# Altium PCB Mother_Board.PcbDoc
Units mm, origin at the board's own origin, x right, y up, seen from the top; angles counter-clockwise.
Board outline 70 x 70 mm, 4 copper layers (Top Layer, Layer 1, Layer 2, Bottom Layer), stack 0.603 mm thick; 62 components, 61 nets, 392 pads, 77 vias.
Unrouted connection lines stored in the file: 36.
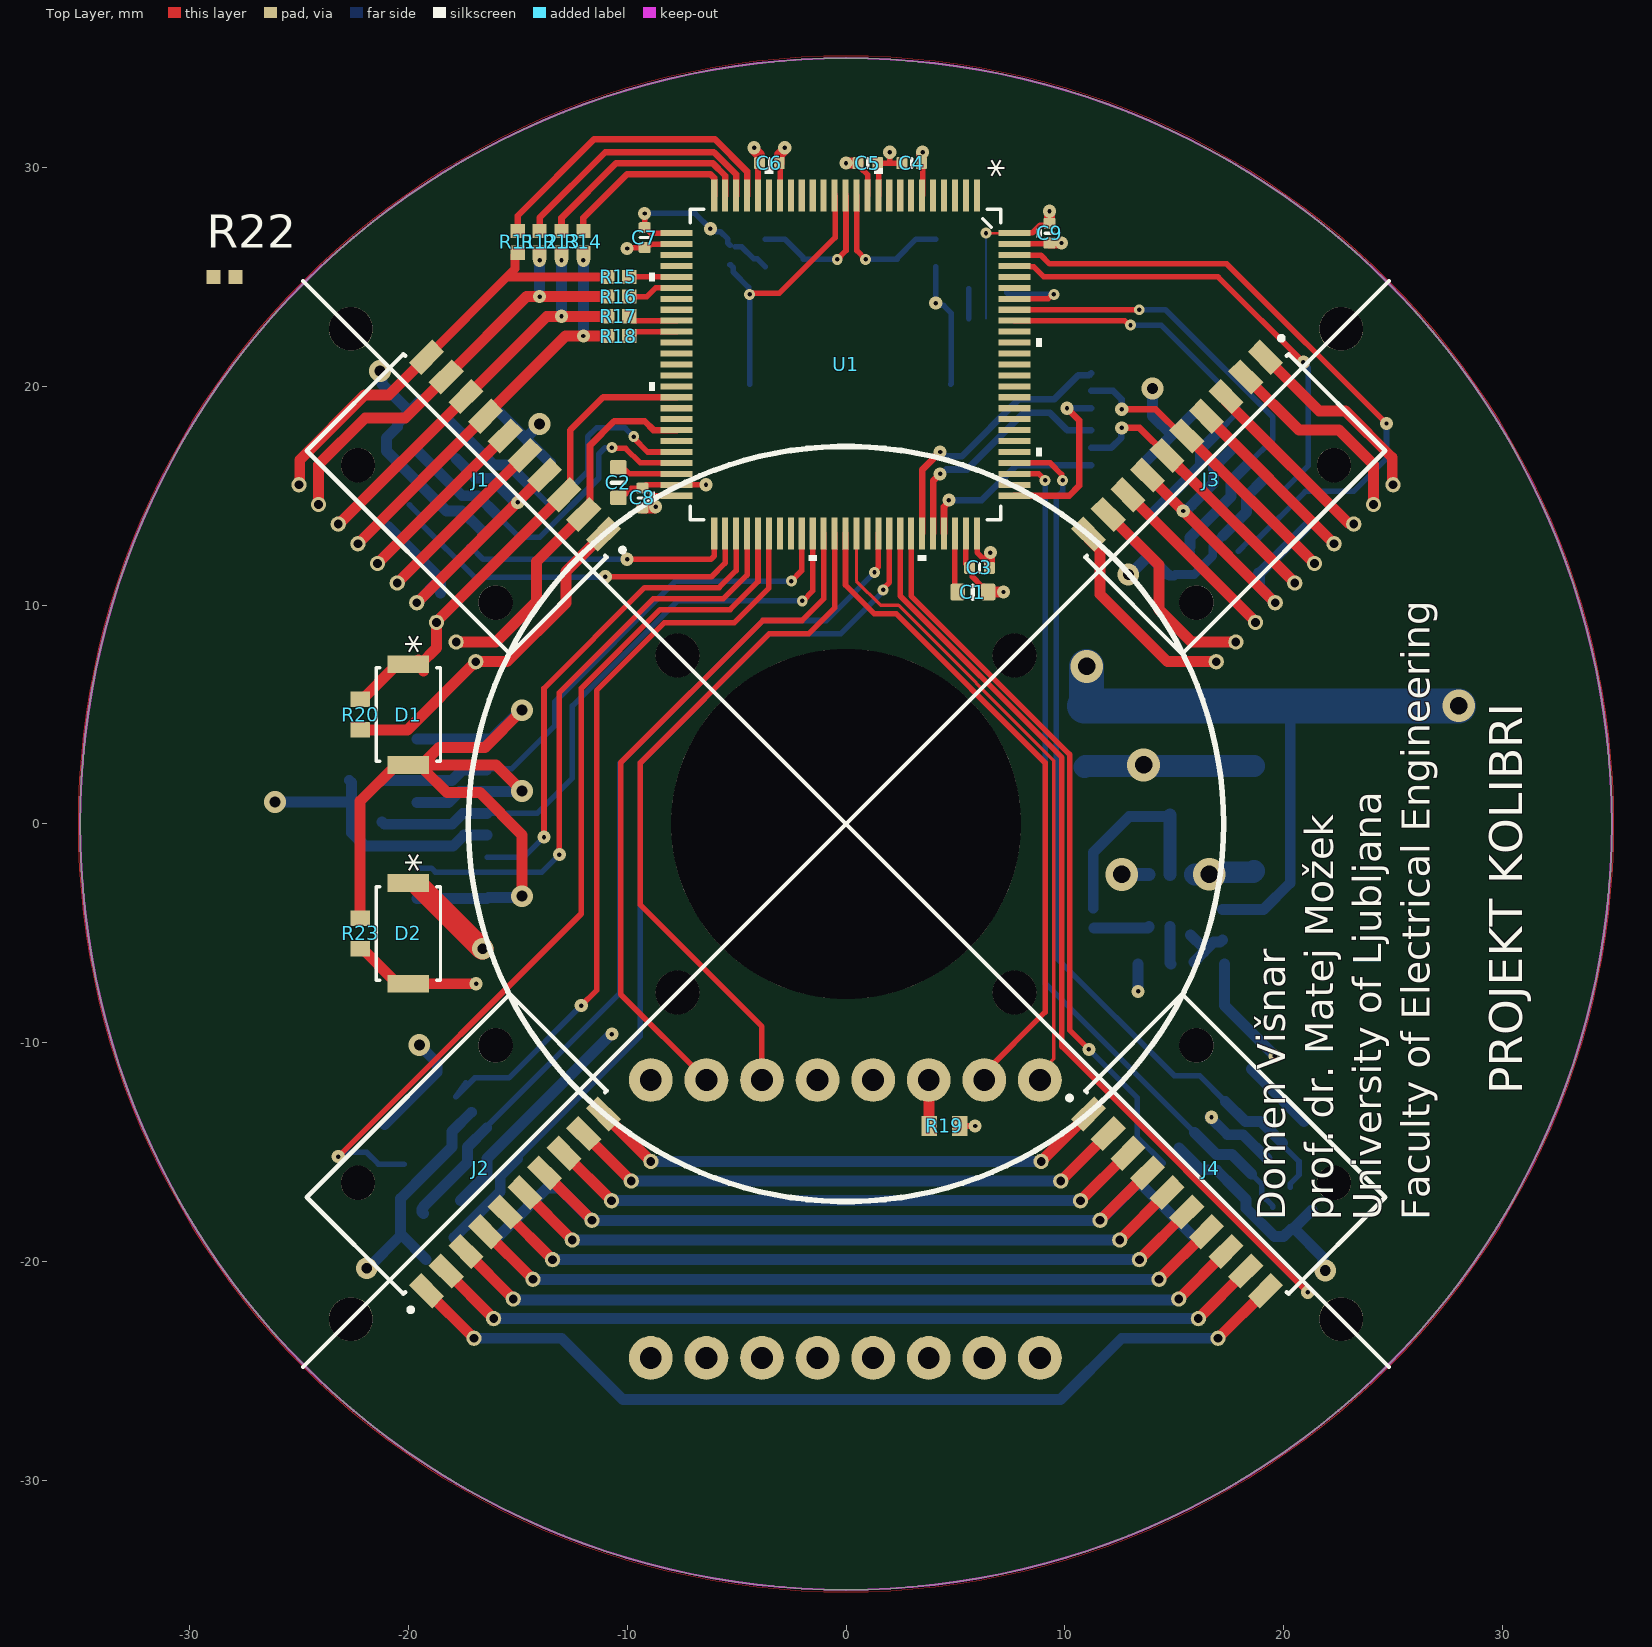
[diagram p0: Top Layer view]
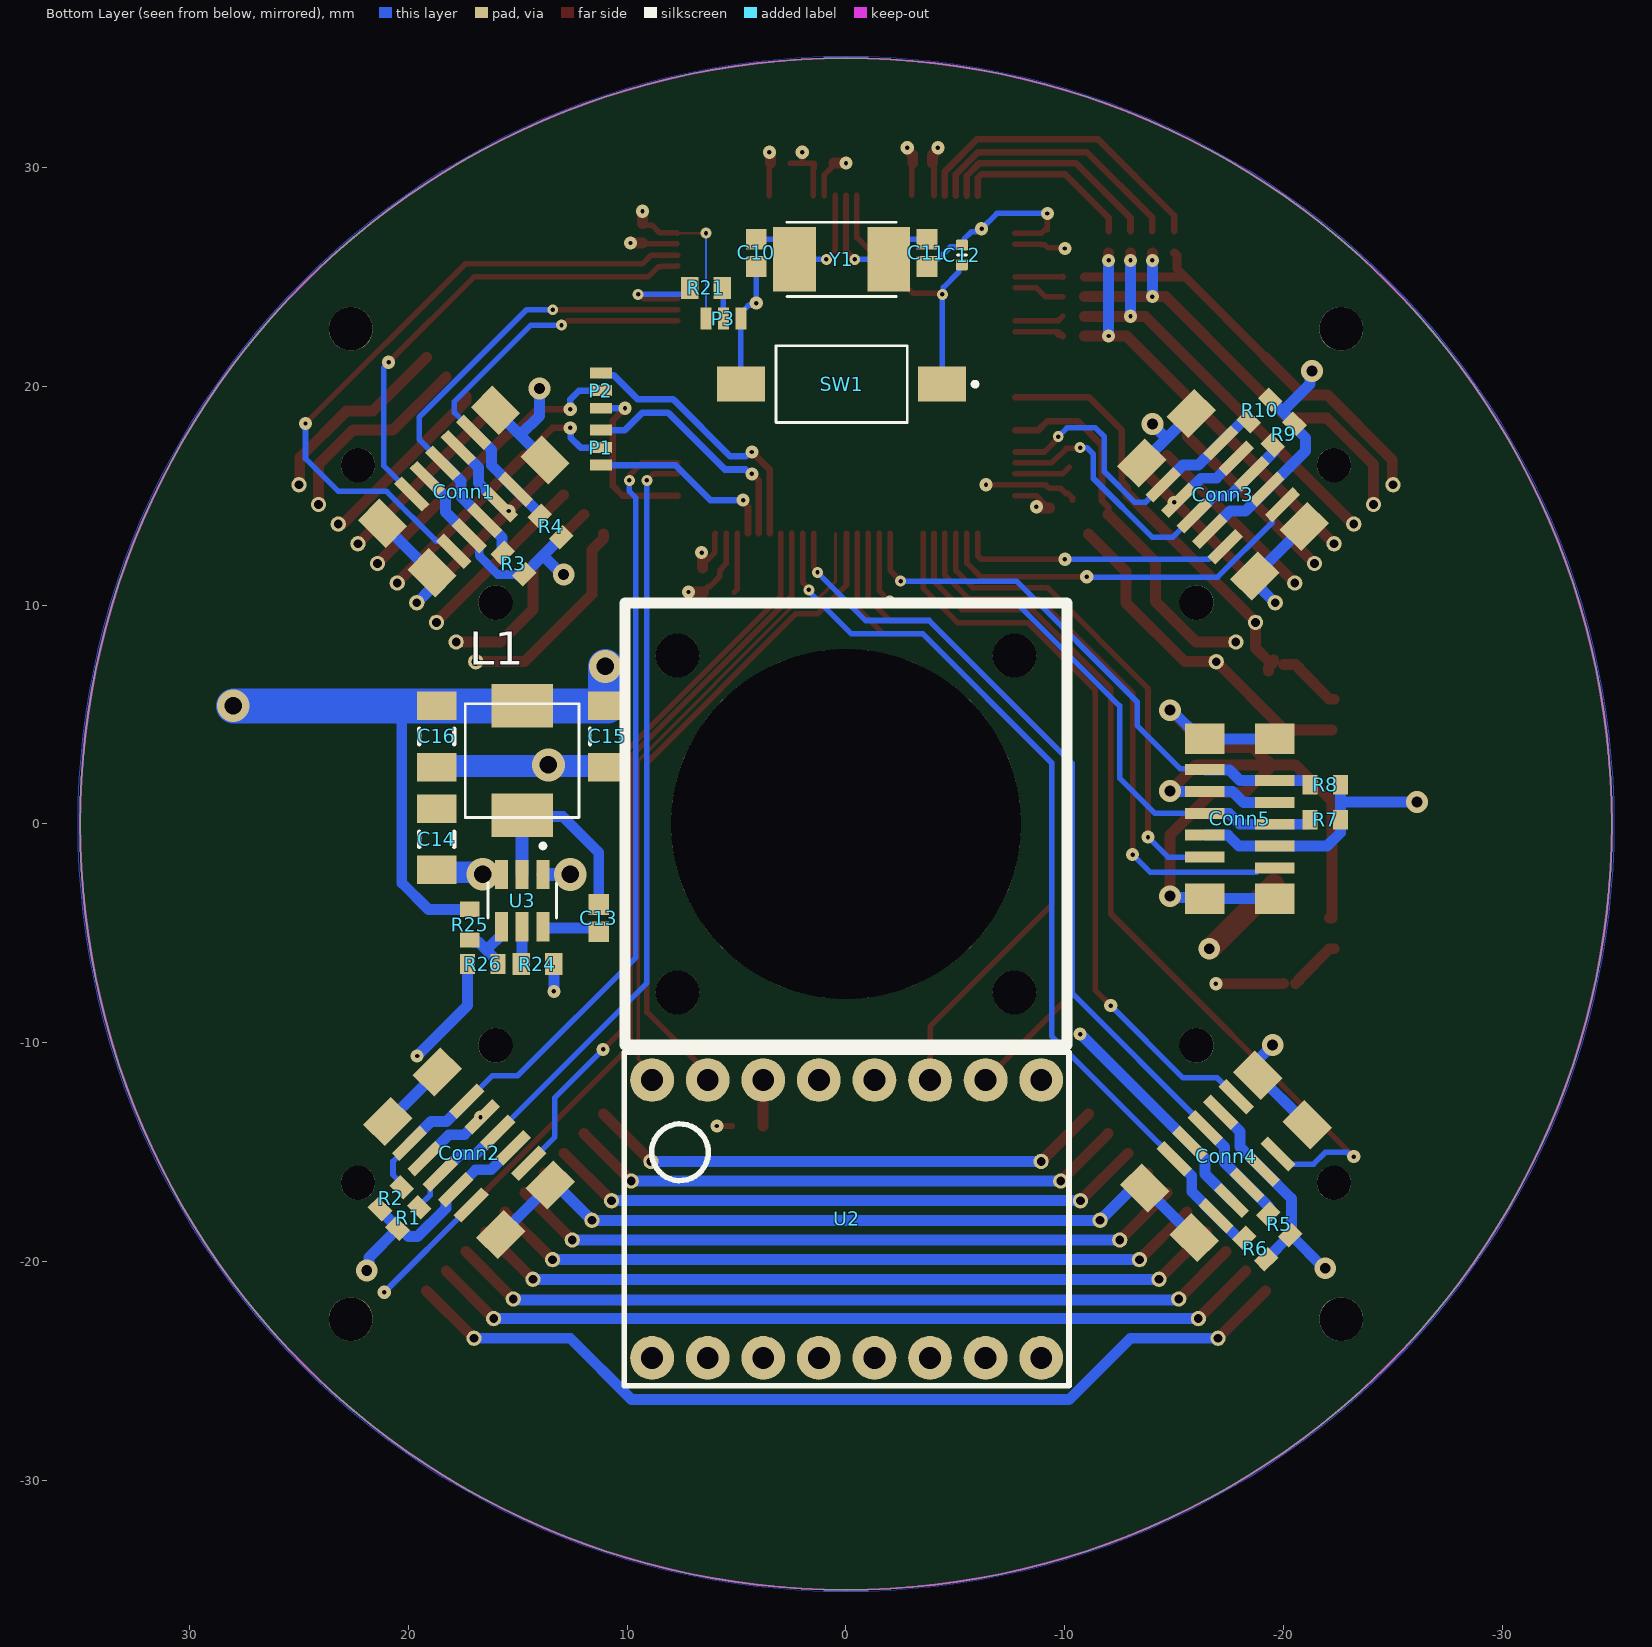
[diagram p1: Bottom Layer view, seen from below]
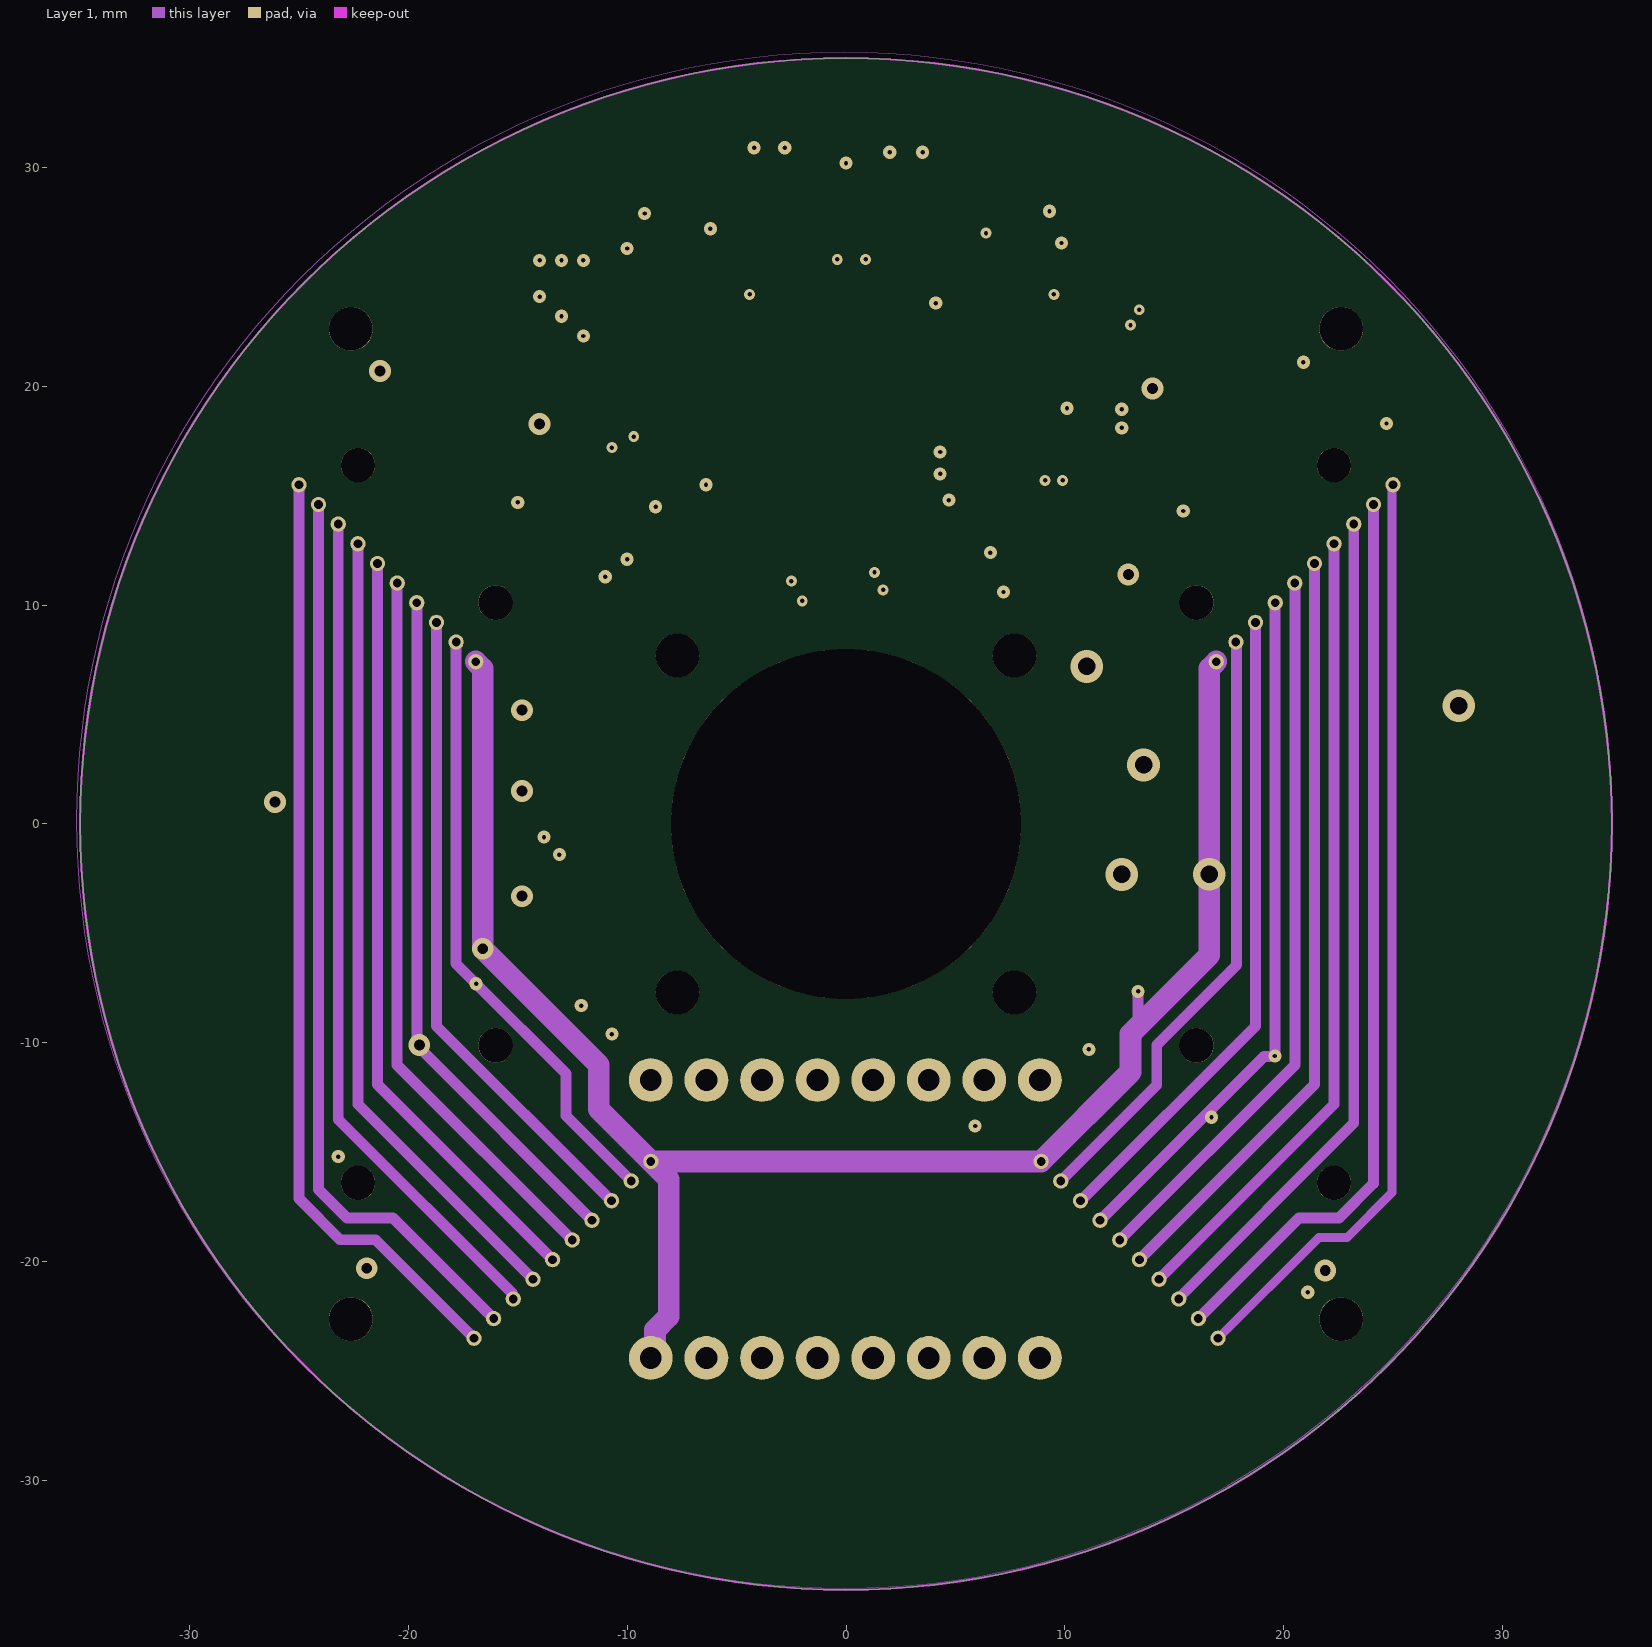
[diagram p2: Layer 1]
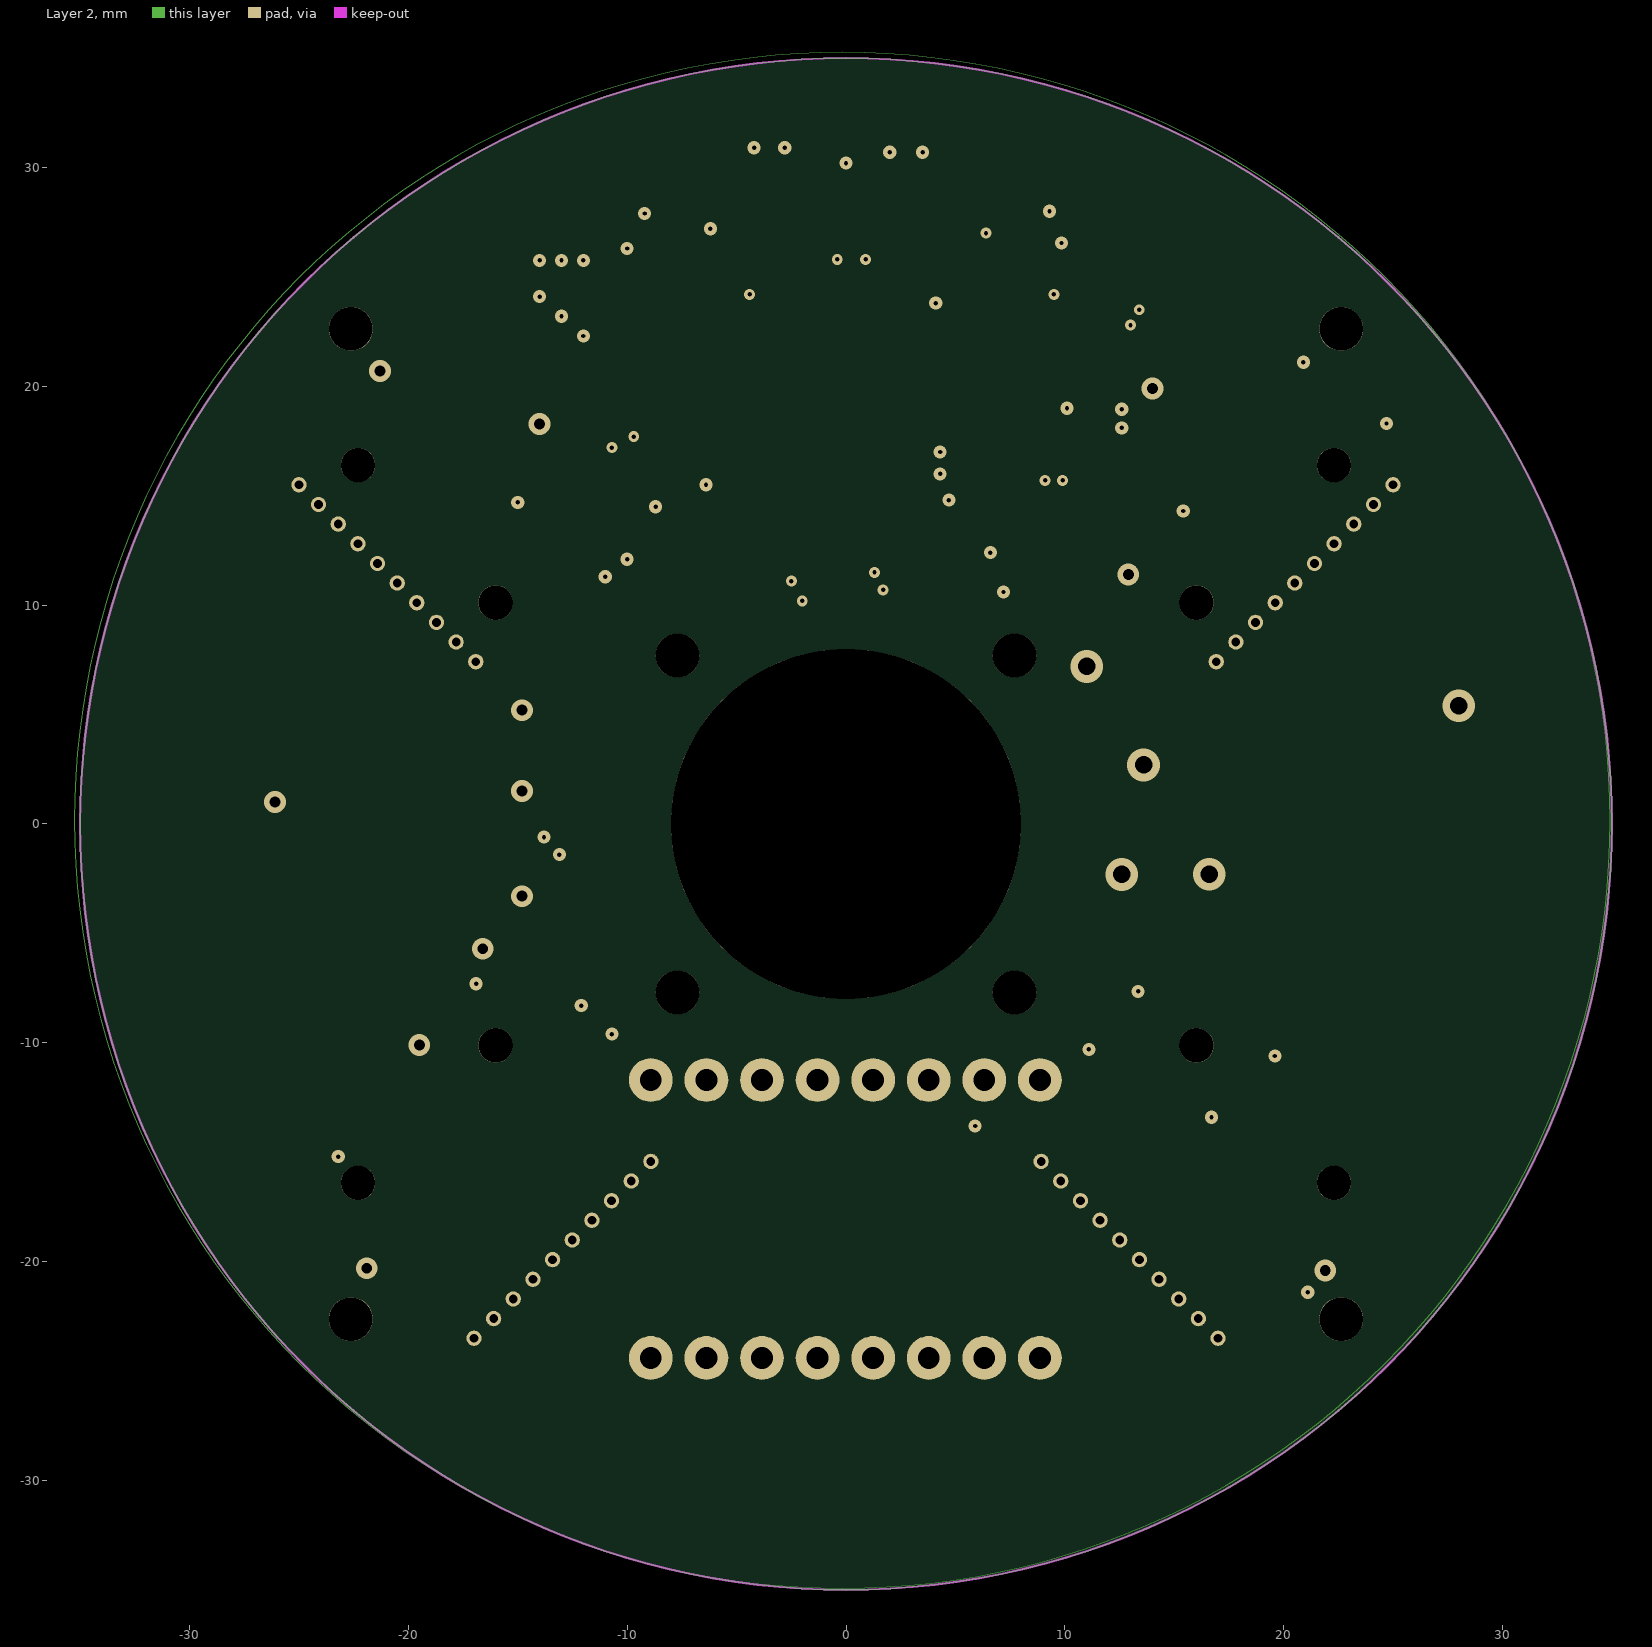
[diagram p3: Layer 2]
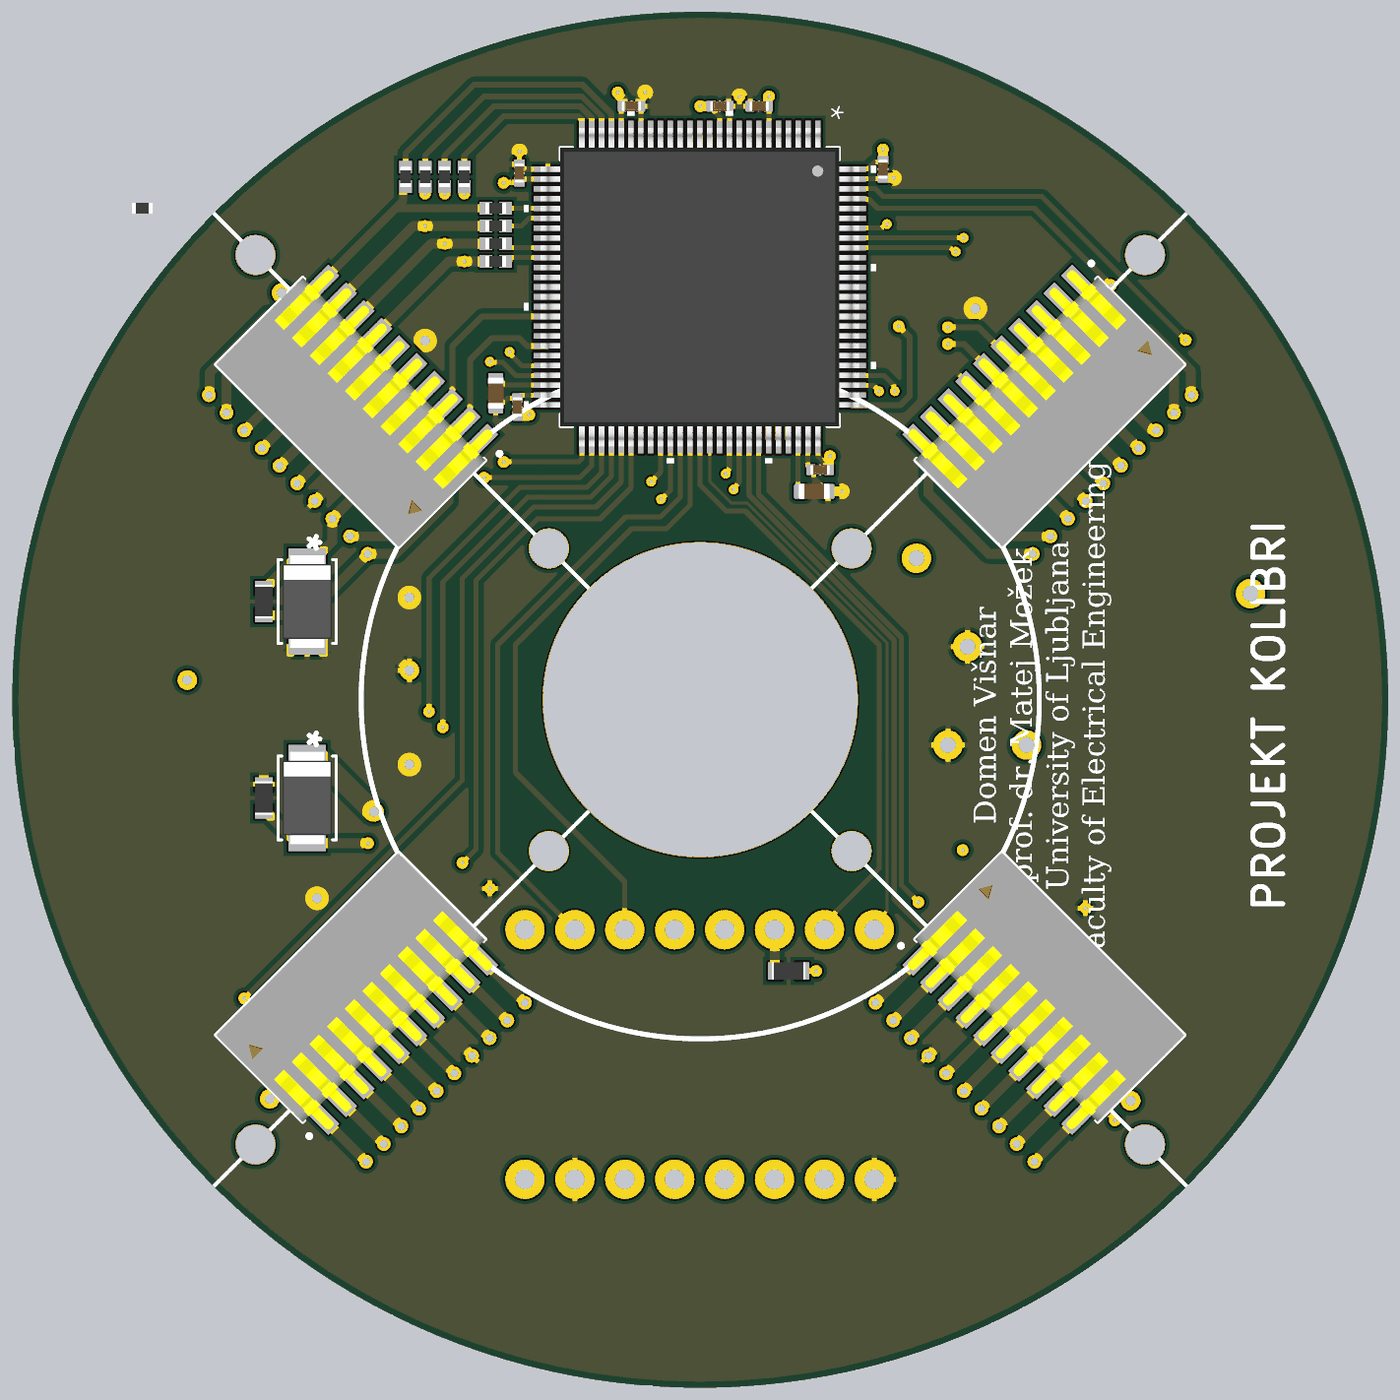
[diagram p4: 3D render of the assembled board from above, using the file's embedded part models]
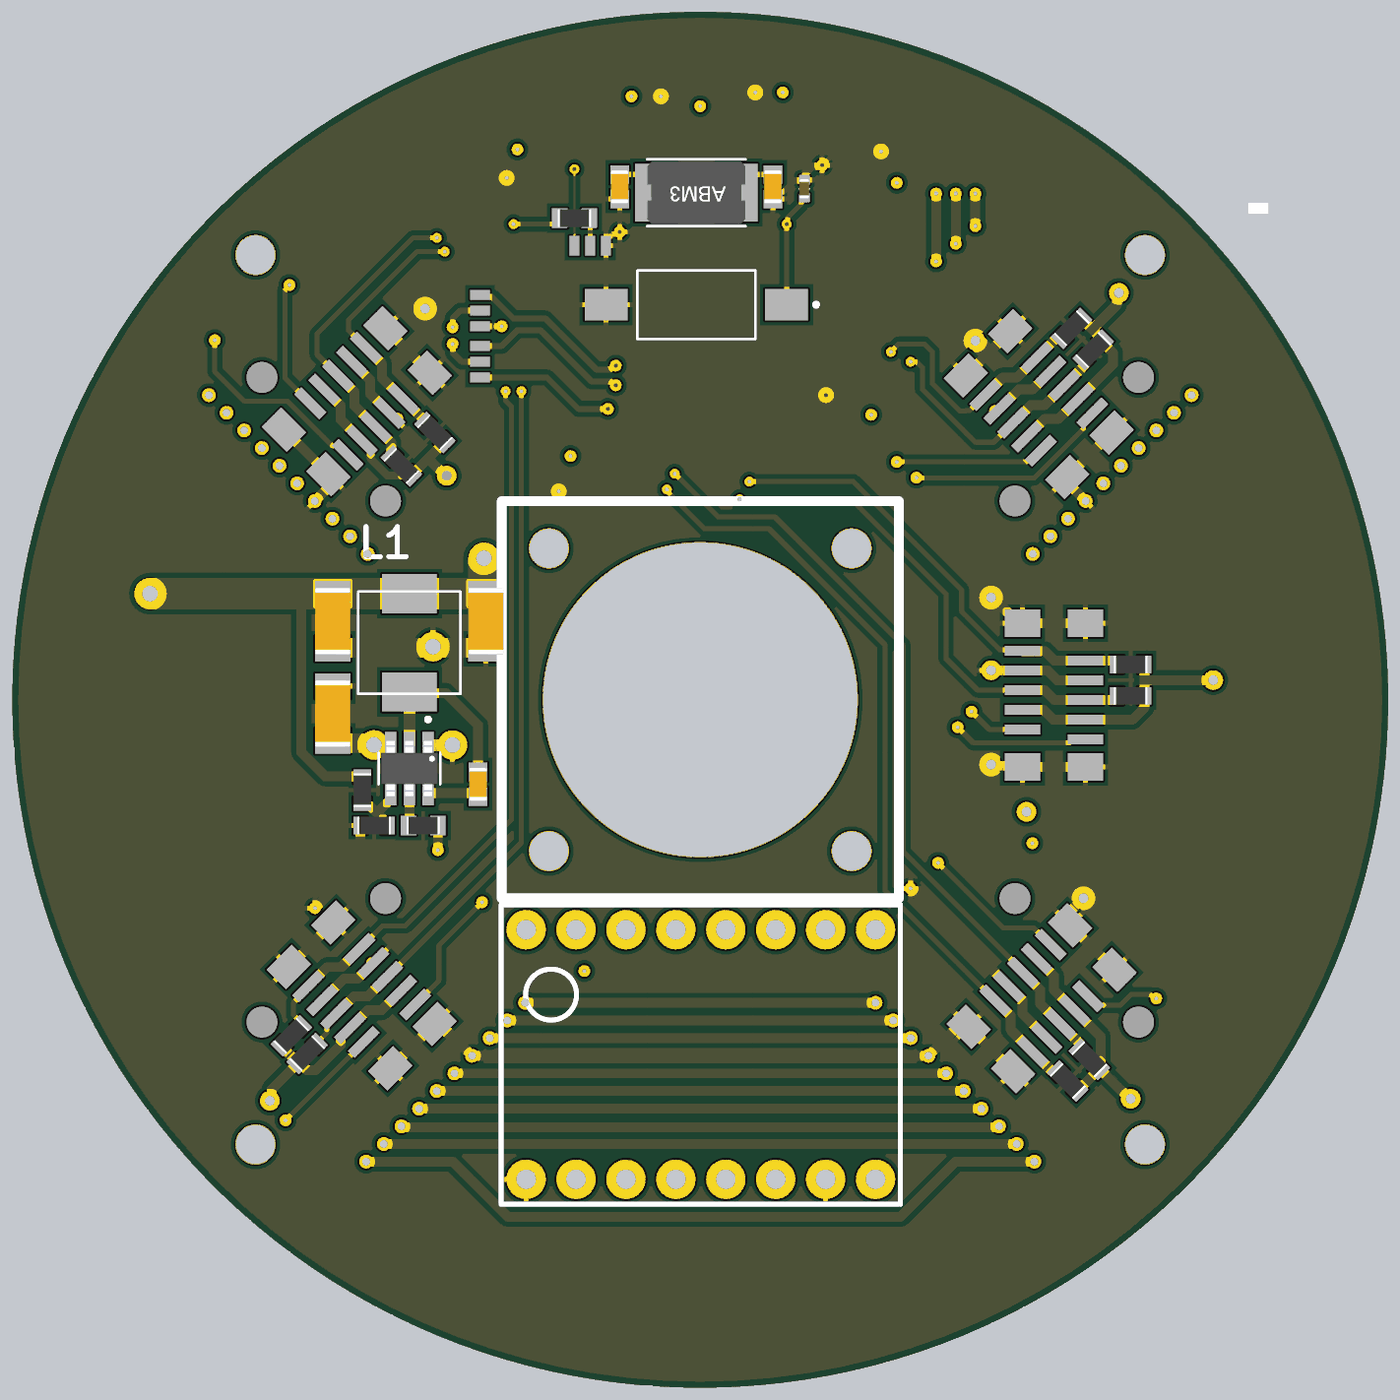
[diagram p5: 3D render of the assembled board from below, using the file's embedded part models]

## Layer stack, top to bottom
Top Solder: solder mask 0.0102, Solder Resist, Dk 3.5
Top Layer: signal copper 0.0356
Dielectric 2: prepreg 0.0711, PP-006, Dk 4.1
Layer 1: signal copper 0.035
Dielectric 1: dielectric 0.32, FR-4, Dk 4.8
Layer 2: signal copper 0.035
Dielectric 3: prepreg 0.0711, PP-006, Dk 4.1
Bottom Layer: signal copper 0.0356
Bottom Solder: solder mask 0.0102, Solder Resist, Dk 3.5

## Board outline
0,-35 cw(c0,0) -35,0 cw(c0,0) 0,35 cw(c0,0) 35,0 cw(c0,0)

## Design rules (kind name [scope] priority, off if disabled: settings)
Clearance [All] p1: gap=0.254 ignorepadtopadclearanceinfootprint=FALSE except(0: Arc-Hole Track-Hole SMDPad-Hole THPad-Hole Via-Hole Fill-Hole Poly-Hole Region-Hole Text-Hole; 0.1: Arc-Arc Arc-Track Track-Track; 0.127: SMDPad-SMDPad; 0.15: Arc-Text Track-Text SMDPad-Text THPad-Text Via-Text Fill-Text Poly-Text Region-Text Text-Text; 0.2: Arc-SMDPad Track-SMDPad; 0.5: THPad-THPad)
DiffPairsRouting [All] p1: maxlimit=0.3 minlimit=0.1 mostfreqgap=0.2 toplayer_minwidth=0.1 toplayer_maxwidth=1 toplayer_prefwidth=0.3 midlayer1_minwidth=0.1 midlayer1_maxwidth=1 midlayer1_prefwidth=0.3 midlayer2_minwidth=0.1 midlayer2_maxwidth=1 midlayer2_prefwidth=0.3 bottomlayer_minwidth=0.1 bottomlayer_maxwidth=1 bottomlayer_prefwidth=0.3 maxuncoupledlength=12.7
HoleSize [All] p1: absolutevalues=TRUE maxlimit=6 minlimit=0.2 maxpercent=80.000 minpercent=20.000
HoleToHoleClearance [All] p1: gap=0.5 allowstackedmicrovias=TRUE
MinimumAnnularRing [All] p1: minimumring=0.15
PolygonConnect [All] p1: connectstyle=Relief reliefconductorwidth=0.254 reliefentries=4 polygonreliefangle="90 Angle" airgapwidth=0.254
RoutingVias [All] p1: holewidth=0.2 width=0.5 viastyle="Through Hole" minholewidth=0.2 minwidth=0.5 maxholewidth=1 maxwidth=2
SolderMaskExpansion [All] p1: expansion=0.102 istentingtop=FALSE
Width [All] p1: maxlimit=2 minlimit=0.1 preferedwidth=0.5 minimp=50.000000 maximp=50.000000 favimp=50.000000
27 further rules are at their usual default settings.

## Components (designator, comment, footprint, x,y, rotation, side; value= is the part's Value field where it differs from the comment)
C1 "Capacitor 4.7µF +/-20% 10V 0603" CAPC0603(1608)100_L 5.8,10.6 r0 top value=2.2µF
C2 "Capacitor 4.7µF +/-20% 10V 0603" CAPC0603(1608)100_L -10.4,15.6 r270 top value=2.2µF
C3 "Capacitor 100nF +/-20% 25V 0402" CAPC0402(1005)60_L 6.1,11.7 r0 top value=100nF
C4 "Capacitor 100nF +/-20% 25V 0402" CAPC0402(1005)60_L 3,30.2 r0 top value=100nF
C5 "Capacitor 100nF +/-20% 25V 0402" CAPC0402(1005)60_L 1,30.2 r180 top value=100nF
C6 "Capacitor 100nF +/-20% 25V 0402" CAPC0402(1005)60_L -3.5,30.2 r180 top value=100nF
C7 "Capacitor 100nF +/-20% 25V 0402" CAPC0402(1005)60_L -9.2,26.8 r270 top value=100nF
C8 "Capacitor 100nF +/-20% 25V 0402" CAPC0402(1005)60_L -9.3,14.9 r270 top value=100nF
C9 "Capacitor 100nF +/-20% 25V 0402" CAPC0402(1005)60_L 9.3,27 r90 top value=100nF
C10 "Capacitor 100 nF +/-10% 50 V 0603" CAPC1608X90X40NL10T20 4.1,26.1 r270 bottom value=100nF
C11 "Capacitor 100 nF +/-10% 50 V 0603" CAPC1608X90X40NL10T20 -3.7,26.1 r270 bottom value=100nF
C12 "Capacitor 100nF +/-20% 25V 0402" CAPC0402(1005)60_L -5.3,26 r270 bottom value=100nF
C13 "Capacitor 100 nF +/-10% 50 V 0603" CAPC1608X90X40NL10T20 11.3,-4.3 r90 bottom value=100nF
C14 "Capacitor 10 uF +/- 10% 16 V 1206" CAPC3216X180X50NL20T25 18.7,-0.7 r270 bottom value=10uF
C15 "Capacitor 10 uF +/- 10% 16 V 1206" CAPC3216X180X50NL20T25 10.9,4 r90 bottom value=22uF
C16 "Capacitor 10 uF +/- 10% 16 V 1206" CAPC3216X180X50NL20T25 18.7,4 r90 bottom value=22uF
Conn1 "ZIF_Connector_10_05mm" ZIF_CONNECTOR_10_05MM 16.162,20.173 r315 bottom
Conn2 "ZIF_Connector_10_05mm" ZIF_CONNECTOR_10_05MM 22.211,-13.736 r225 bottom
Conn3 "ZIF_Connector_10_05mm" ZIF_CONNECTOR_10_05MM -12.241,16.352 r225 bottom
Conn4 "ZIF_Connector_10_05mm" ZIF_CONNECTOR_10_05MM -16.062,-20.173 r135 bottom
Conn5 "ZIF_Connector_10_05mm" ZIF_CONNECTOR_10_05MM -15.4,4.688 r270 bottom
D1 "PMEG3030BEP,115" CFP5_SOD128_NEX -20,5 r270 top
D2 "PMEG3030BEP,115" CFP5_SOD128_NEX -20,-5 r270 top
J1 "SIBF-10-F-S-AD" SAMTEC_SIBF-10-F-S-AD -11.084,13.248 r135 top
J2 "SIBF-10-F-S-AD" SAMTEC_SIBF-10-F-S-AD -19.166,-21.33 r45 top
J3 "" SAMTEC_SIBF-10-F-S-AD 19.166,21.33 r225 top
J4 "SIBF-10-F-S-AD" SAMTEC_SIBF-10-F-S-AD 11.084,-13.248 r315 top
L1 "3.3uH 2020" IHLP-2020CZ-11 14.8,2.9 r90 bottom
P1 "3waySolderPad" 3WAYSOLDERPAD 11.2,18 r270 bottom
P2 "3waySolderPad" 3WAYSOLDERPAD 11.2,20.6 r270 bottom
P3 "3waySolderPad" 3WAYSOLDERPAD 6.4,23.1 r180 bottom
R1 "Resistor 0R +/- 5% 0603 100 mW" RESC1608X55X25NL10T15 20,-18 r135 bottom value=2.2k
R2 "Resistor 0R +/- 5% 0603 100 mW" RESC1608X55X25NL10T15 20.8,-17.1 r135 bottom value=2.2k
R3 "Resistor 0R +/- 5% 0603 100 mW" RESC1608X55X25NL10T15 15.2,11.9 r45 bottom value=2.2k
R4 "Resistor 0R +/- 5% 0603 100 mW" RESC1608X55X25NL10T15 13.5,13.6 r45 bottom value=2.2k
R5 "Resistor 0R +/- 5% 0603 100 mW" RESC1608X55X25NL10T15 -19.8,-18.3 r45 bottom value=2.2k
R6 "Resistor 0R +/- 5% 0603 100 mW" RESC1608X55X25NL10T15 -18.7,-19.4 r45 bottom value=2.2k
R7 "Resistor 0R +/- 5% 0603 100 mW" RESC1608X55X25NL10T15 -21.9,0.2 r0 bottom value=2.2k
R8 "Resistor 0R +/- 5% 0603 100 mW" RESC1608X55X25NL10T15 -21.9,1.8 r0 bottom value=2.2k
R9 "Resistor 0R +/- 5% 0603 100 mW" RESC1608X55X25NL10T15 -20,17.8 r315 bottom value=2.2k
R10 "Resistor 0R +/- 5% 0603 100 mW" RESC1608X55X25NL10T15 -18.9,18.9 r315 bottom value=2.2k
R11 "Resistor 0R +/- 5% 0402 100 mW" RESC1005X40X25ML05T05 -15,26.6 r90 top value=0
R12 "Resistor 0R +/- 5% 0402 100 mW" RESC1005X40X25ML05T05 -14,26.6 r90 top value=0
R13 "Resistor 0R +/- 5% 0402 100 mW" RESC1005X40X25ML05T05 -13,26.6 r90 top value=0
R14 "Resistor 0R +/- 5% 0402 100 mW" RESC1005X40X25ML05T05 -12,26.6 r90 top value=0
R15 "Resistor 0R +/- 5% 0402 100 mW" RESC1005X40X25ML05T05 -10.4,25 r0 top value=0
R16 "Resistor 0R +/- 5% 0402 100 mW" RESC1005X40X25ML05T05 -10.4,24.1 r0 top value=0
R17 "Resistor 0R +/- 5% 0402 100 mW" RESC1005X40X25ML05T05 -10.4,23.2 r0 top value=0
R18 "Resistor 0R +/- 5% 0402 100 mW" RESC1005X40X25ML05T05 -10.4,22.3 r0 top value=0
R19 "Resistor 0R +/- 5% 0603 100 mW" RESC1608X55X25NL10T15 4.5,-13.8 r180 top value=10k
R20 "Resistor 0R +/- 5% 0603 100 mW" RESC1608X55X25NL10T15 -22.2,5 r90 top value=10k
R21 "Resistor 10kR +/- 5% 0603 100 mW" RESC1608X55X25ML10T15 6.4,24.5 r180 bottom value=10k
R22 "Resistor 0R +/- 5% 0402 100 mW" RESC1005X40X25ML05T05 -28.4,25 r180 top value=0
R23 "Resistor 0R +/- 5% 0603 100 mW" RESC1608X55X25NL10T15 -22.2,-5 r90 top value=10k
R24 "Resistor 10kR +/- 5% 0603 100 mW" RESC1608X55X25ML10T15 14.1,-6.4 r180 bottom value=10k
R25 "Resistor 0R +/- 5% 0603 100 mW" RESC1608X55X25NL10T15 17.2,-4.6 r270 bottom value=31.6k
R26 "Resistor 0R +/- 5% 0603 100 mW" RESC1608X55X25NL10T15 16.6,-6.4 r0 bottom value=10k
SW1 "FSMSM" TE_FSMSM 0.2,20.1 r0 bottom
U1 "STM32H723VET6" LQFP100_STM -0.022,21 r270 top
U2 "StepperDriver_DRV8834_Module" STEPPERDRIVER_DRV8834_MODULE 10.13,-10.43 r270 bottom
U3 "AP62300TWU-7" SOT95P280X100-6N 14.8,-3.5 r270 bottom
Y1 "ABM3-25.000MHZ-D2Y-T" XTAL500X320X130N 0.2,25.8 r0 bottom

## Footprints (in the part's own frame and the unit in brackets; to place one, negate y for a bottom-side part, rotate by r counter-clockwise, add the part's x,y. Pads: shape width x height; smd on the part's side, far side on the other; paste and mask are expansions set on the pad)
3WAYSOLDERPAD [mm]
  rect 0.5x1 smd: 1(0,0) 2(0.8,0) 3(1.6,0)
CAPC0402(1005)60_L [mm] "Chip Capacitor, Body 1.0x0.5mm, Height 0.6mm, IPC High Density"
  rrect25% 0.5x0.55 smd: 1(-0.45,0) 2(0.45,0)
  silkscreen extent 0,-0.2 0,0.2, body extent -0.5,-0.25 0.5,0.25, height 0.6
CAPC0603(1608)100_L [mm] "Chip Capacitor, Body 1.6x0.8mm, Height 1.0mm, IPC High Density"
  rrect25% 0.66x0.76 smd: 1(-0.7,0) 2(0.7,0)
  silkscreen extent 0,-0.3 0,0.3, body extent -0.8,-0.4 0.8,0.4, height 0.95
CAPC1608X90X40NL10T20 [mm] "Chip Capacitor, 2-Leads, Body 1.70x0.90mm, IPC Medium Density"
  rect 0.95x0.95 smd: 1(-0.625,0) 2(0.625,0)
  body extent -0.85,-0.45 0.85,0.45, height 0.9
CAPC3216X180X50NL20T25 [mm] "Chip Capacitor, 2-Leads, Body 3.40x1.80mm, IPC Medium Density"
  rect 1.3x1.8 smd: 1(-1.4,0) 2(1.4,0)
  silkscreen extent -0.35,-0.8 0.35,0.8, body extent -1.7,-0.9 1.7,0.9, height 1.8
CFP5_SOD128_NEX [mil]
  rect 32x75 smd: 1(-90.5,0) 2(90.5,0)
  silkscreen extent -84,-58 84,58, body extent -93,-49 93,49, height 43
IHLP-2020CZ-11 [mm]
  rect 2x2.8 smd: P$1(-2.5,0) P$2(2.5,0)
  silkscreen extent -2.6,-2.6 2.6,2.6
LQFP100_STM [mil]
  rect 58x11 smd mask+5: 1(-304,236.22) 2(-304,216.54) 3(-304,196.85) 4(-304,177.17) 5(-304,157.48) 6(-304,137.8) 7(-304,118.11) 8(-304,98.43) 9(-304,78.74) 10(-304,59.06) 11(-304,39.37) 12(-304,19.69) 13(-304,0) 14(-304,-19.69) 15(-304,-39.37) 16(-304,-59.06) 17(-304,-78.74) 18(-304,-98.43) 19(-304,-118.11) 20(-304,-137.8) 21(-304,-157.48) 22(-304,-177.17) 23(-304,-196.85) 24(-304,-216.54) 25(-304,-236.22) 51(304,-236.22) 52(304,-216.54) 53(304,-196.85) 54(304,-177.17) 55(304,-157.48) 56(304,-137.8) 57(304,-118.11) 58(304,-98.43) 59(304,-78.74) 60(304,-59.06) 61(304,-39.37) 62(304,-19.69) 63(304,0) 64(304,19.68) 65(304,39.37) 66(304,59.06) 67(304,78.74) 68(304,98.43) 69(304,118.11) 70(304,137.8) 71(304,157.48) 72(304,177.17) 73(304,196.85) 74(304,216.54) 75(304,236.22)
  rect 11x58 smd mask+5: 26(-236.22,-304) 27(-216.54,-304) 28(-196.85,-304) 29(-177.17,-304) 30(-157.48,-304) 31(-137.8,-304) 32(-118.11,-304) 33(-98.43,-304) 34(-78.74,-304) 35(-59.06,-304) 36(-39.37,-304) 37(-19.69,-304) 38(0,-304) 39(19.68,-304) 40(39.37,-304) 41(59.06,-304) 42(78.74,-304) 43(98.43,-304) 44(118.11,-304) 45(137.8,-304) 46(157.48,-304) 47(177.17,-304) 48(196.85,-304) 49(216.54,-304) 50(236.22,-304) 76(236.22,304) 77(216.54,304) 78(196.85,304) 79(177.17,304) 80(157.48,304) 81(137.8,304) 82(118.11,304) 83(98.43,304) 84(78.74,304) 85(59.06,304) 86(39.37,304) 87(19.68,304) 88(0,304) 89(-19.69,304) 90(-39.37,304) 91(-59.06,304) 92(-78.74,304) 93(-98.43,304) 94(-118.11,304) 95(-137.8,304) 96(-157.48,304) 97(-177.17,304) 98(-196.85,304) 99(-216.54,304) 100(-236.22,304)
  silkscreen extent -353,-353 353,353, body extent -319,-319 319,319, height 63
RESC1005X40X25ML05T05 [mm] "Chip Resistor, 2-Leads, Body 1.05x0.55mm, IPC Low Density"
  rect 0.65x0.65 smd: 1(-0.5,0) 2(0.5,0)
  body extent -0.53,-0.28 0.53,0.28, height 0.4
RESC1608X55X25ML10T15 [mm] "Chip Resistor, 2-Leads, Body 1.70x0.90mm, IPC Low Density"
  rect 0.8x1 smd: 1(-0.75,0) 2(0.75,0)
  body extent -0.85,-0.45 0.85,0.45, height 0.55
RESC1608X55X25NL10T15 [mm] "Chip Resistor, 2-Leads, Body 1.70x0.90mm, IPC Medium Density"
  rect 0.7x0.9 smd: 1(-0.7,0) 2(0.7,0)
  body extent -0.85,-0.45 0.85,0.45, height 0.55
SAMTEC_SIBF-10-F-S-AD [mil]
  rect 31x59 smd: 1(0,0) 2(50,0) 3(100,0) 4(150,0) 5(200,0) 6(250,0) 7(300,0) 8(350,0) 9(400,0) 10(450,0)
  round 62 hole 62 unplated: ""(50,224.5) ""(400,224.5)
  silkscreen extent -48,-8 485,272, body extent -34,-24 483,271, height 189
SOT95P280X100-6N [mm]
  rect 1.34x0.59 smd: 1(-1.19,0.95) 2(-1.19,0) 3(-1.19,-0.95) 4(1.19,-0.95) 5(1.19,0) 6(1.19,0.95)
  silkscreen extent -2.6,-1.57 0.8,1.57, body extent -1.4,-1.45 1.4,1.45, height 1
STEPPERDRIVER_DRV8834_MODULE [mm] "https://www.pololu.com/product/2133"
  round 2 hole 1: 1(1.27,19.05) 2(1.27,16.51) 3(1.27,13.97) 4(1.27,11.43) 5(1.27,8.89) 6(1.27,6.35) 7(1.27,3.81) 8(1.27,1.27) 9(13.97,19.05) 10(13.97,16.51) 11(13.97,13.97) 12(13.97,11.43) 13(13.97,8.89) 14(13.97,6.35) 15(13.97,3.81) 16(13.97,1.27)
  silkscreen extent 0,0 15.24,20.32
TE_FSMSM [mm]
  rect 2.19x1.6 smd: 1(-4.59,0) 2(4.59,0)
  silkscreen extent -6.2,-1.75 3,1.75
XTAL500X320X130N [mm]
  rect 1.95x2.95 smd: 1(-2.15,0) 2(2.15,0)
  silkscreen extent -2.5,-1.7 2.5,1.7, body extent -2.5,-1.6 2.5,1.6, height 1.3
ZIF_CONNECTOR_10_05MM [mm]
  rect 0.5x1.8 smd: 1(6.7,4.2) 2(6.2,1) 3(5.7,4.2) 4(5.2,1) 5(4.7,4.2) 6(4.2,1) 7(3.7,4.2) 8(3.2,1) 9(2.7,4.2) 10(2.2,1)
  rect 1.4x1.8 smd: GND(0.8,4.2) GND(0.8,1) GND(8.1,4.2) GND(8.1,1)

## Part data
C1 C2: library part CMP-001-00076-3, "Chip Capacitor, 4.7µF +/-20%, 10V, 0603, Thickness 1 mm", Case/Package=0603, Max Operating Temperature=85°C, Min Operating Temperature=-55°C, Tolerance=10%, Voltage Rating=10V, Mounting Technology=SMT, Pins=2
C3 C4 C5 C6 C7 C8 C9 C12: library part CMP-001-00065-3, "Chip Capacitor, 100nF +/-20%, 25V, 0402, Thickness 0.6 mm", Case/Package=0402, Max Operating Temperature=85°C, Min Operating Temperature=-55°C, Tolerance=10%, Voltage Rating=25V, Mounting Technology=SMT, Pins=2
C10 C11 C13: library part CMP-001-00017-5, "Chip Capacitor, 100 nF, +/- 10%, 50 V, 0603 (1608 Metric)", Capacitor Type=Ceramic, Case/Package=0603, Max Operating Temperature=125°C, Min Operating Temperature=-55°C, Tolerance=10%, Voltage Rating=50V, Mounting Technology=SM, Pins=2, RoHS Compliant=True
C14 C15 C16: library part CMP-001-00016-5, "Chip Capacitor, 22 uF, +/- 10%, 16 V, 1206 (3216 Metric)", Capacitor Type=Ceramic, Case/Package=1206, Max Operating Temperature=125°C, Min Operating Temperature=-55°C, Tolerance=10%, Voltage Rating=16V, Mounting Technology=SM, Pins=2, RoHS Compliant=True
D1 D2 J1 J2 J4 U3: Package=None, Availability=Unavailable, Price=None
  D1 D2: MF="{'manufacturer': u'Nexperia USA'}", MP=PMEG3030BEP,115
  J1 J2 J4: MF="{'manufacturer': u'Samtec Inc.'}", MP=SIBF-10-F-S-AD
  U3: MF="{'manufacturer': u'Diodes Incorporated'}", MP=AP62300TWU-7
J3: library part SIBF-10-F-S-AD, Package=None, Availability=Unavailable, MF="{'manufacturer': u'Samtec Inc.'}", MP=SIBF-10-F-S-AD, Price=None
L1: library part IHLP2020CZER3R3M11, "3.3ÂµH Shielded Molded Inductor 5.5A 40.4mOhm Max Nonstandard", Package=None, Availability=Unavailable, MF="{'manufacturer': u'Vishay Dale'}", MP=IHLP2020CZER3R3M11, Price=None
R1 R2 R3 R4 R5 R6 R7 R8 R9 R10 R19 R20 R23 R25 R26: library part CMP-009-00006-4, "Chip Resistor, 0 Ohm, 0.1 W, -55 to 155 degC, 0603 (1608 Metric)", Case/Package=0603, Max Operating Temperature=155°C, Min Operating Temperature=-55°C, Power=100mW, Tolerance=5%, Voltage Rating=50V, Mounting Technology=SM, Pins=2, RoHS Compliant=True
R11 R12 R13 R14 R15 R16 R17 R18 R22: library part CMP-009-00005-4, "Chip Resistor, 0 Ohm, 0.1 W, -55 to 155 degC, 0402 (1005 Metric)", Case/Package=0402, Max Operating Temperature=155°C, Min Operating Temperature=-55°C, Power=100mW, Tolerance=5%, Voltage Rating=50V, Mounting Technology=SM, Pins=2, RoHS Compliant=True
R21 R24: library part CMP-009-00006-4, "Chip Resistor, 10 kOhm, 0.1 W, -55 to 155 degC, 0603 (1608 Metric)", Case/Package=0603, Max Operating Temperature=155°C, Min Operating Temperature=-55°C, Power=100mW, Tolerance=5%, Voltage Rating=50V, Mounting Technology=SM, Pins=2, RoHS Compliant=True
SW1: "Switch Tactile OFF (ON) SPST Rectangular Button Gull Wing 0.05A 12VDC SMD Loose Piece", Package=None, Availability=Unavailable, MF="{'manufacturer': u'TE Connectivity'}", MP=FSMSM, Price=None
U1: "No Description Available", Mfr_Name=STMicroelectronics, Copyright="Copyright (C) 2022 Ultra Librarian. All rights reserved.", Manufacturer_Part_Number=STM32H723VET6, RefDes=RefDes, Type=DEV
Y1: "Crystals 12MHz 18pF 30ppm -40C +85C", Package=None, Availability=Unavailable, MF="{'manufacturer': u'Abracon'}", MP=ABM3-25.000MHZ-D2Y-T, Price=None

## Free pads (board coordinates)
  round 2 hole 2: 1(-22.627,-22.627) 1(-22.627,22.627) 1(-7.7,-7.7) 1(-7.7,7.7) 1(7.7,-7.7) 1(7.7,7.7) 1(22.627,-22.627) 1(22.627,22.627)
  round 0.7 hole 0.4: 1(-17,-23.5) 1(-16.918,7.418) 1(8.918,-15.418) 1(25,15.5) 2(-17.816,8.316) 2(-16.102,-22.602) 2(9.816,-16.316) 2(24.102,14.602) 3(-18.714,9.214) 3(-15.204,-21.704) 3(10.714,-17.214) 3(23.204,13.704) 4(-19.612,10.112) 4(-14.306,-20.806) 4(11.612,-18.112) 4(22.306,12.806) 5(-20.51,11.01) 5(-13.408,-19.908) 5(12.51,-19.01) 5(21.408,11.908) 6(-21.408,11.908) 6(-12.51,-19.01) 6(13.408,-19.908) 6(20.51,11.01) 7(-22.306,12.806) 7(-11.612,-18.112) 7(14.306,-20.806) 7(19.612,10.112) 8(-23.204,13.704) 8(-10.714,-17.214) 8(15.204,-21.704) 8(18.714,9.214) 9(-24.102,14.602) 9(-9.816,-16.316) 9(16.102,-22.602) 9(17.816,8.316) 10(-25,15.5) 10(-8.918,-15.418) 10(16.918,7.418) 10(17,-23.5)
  round 16 hole 16: 1(0,0)

## Via types
v1: diameter 0.6, hole 0.2, Top Layer to Bottom Layer, 45 vias
v2: diameter 0.5, hole 0.2, Top Layer to Bottom Layer, 15 vias
v3: diameter 1, hole 0.5, Top Layer to Bottom Layer, 12 vias
v4: diameter 1.5, hole 0.8, Top Layer to Bottom Layer, 5 vias

## Nets (pads, with @x,y where several pads share a name; then routed paths per layer and width w, separated by ;. In a path a pad name is that pad's centre, name@x,y a point inside that pad or via, vN(x,y) a via of type N, cw(c..) or ccw(c..) an arc to the next point about the centre after c; other vN are vias at no path point)
3.3V: C3.2 C4.2 C5.2 C6.2 C7.2 C8.2 C9.2 C15.2 C16.2 Conn1.3 Conn1.4 Conn2.3 Conn2.4 Conn3.3 Conn3.4 Conn4.3 Conn4.4 Conn5.3 Conn5.4 L1.P$2 P3.1 R1.1 R2.1 R3.1 R4.1 R5.1 R6.1 R7.1 R8.1 R9.1 R10.1 R19.1 R25.1 U1.6 U1.11 U1.21 U1.27 U1.50 U1.75 U1.100 | length 109.5
  Top Layer w0.1: v2(6.4,27) U1.100 U1.100@7.722,27
  Top Layer w0.254: v1(-10,26.3) -9.975,26.325 -9.225,26.325 -9.077,26.473 -8.93,26.473 -8.903,26.5 U1.27@-7.722,26.5 ; C8.2 -9.177,14.573 -9.126,14.573 -8.699,15 U1.50@-7.722,15 ; U1.21 -4.022,30.128 C6.2 ; C5.2@0.673,29.986 1,29.659 U1.11@1,28.722 ; U1.6@3.5,28.722 C4.2@3.5,30.15 ; R19.1 v1(5.9,-13.8) ; U1.75 5.991,13.266 5.991,12.408 C3.2@6.427,11.972 ; U1.100@7.722,27 7.734,27.013 8.513,27.013 8.865,27.365 9.215,27.365 C9.2
  Top Layer w0.5: C8.2 -8.75,14.45 v1(-8.7,14.5) ; v1(-4.2,30.9) -4.2,30.819 -3.95,30.569 C6.2 ; v1(0,30.2) C5.2 ; C4.2 3.45,30.65 v1(3.5,30.7) ; C3.2 6.55,12.35 v1(6.6,12.4) ; C9.2 v1(9.3,28)
  Bottom Layer w0.1: P3.1 v2(6.4,27)
  Bottom Layer w0.254: R5.1@-20.366,-18.724 R5.1 ; -17.45,-0.532 -16.42,-0.532 Conn5.4
  Bottom Layer w0.4: R3.1 14.776,11.334 14.988,11.334 15.059,11.405 15.907,11.405 16.763,12.261 16.763,12.713 Conn1.3
  Bottom Layer w0.5: v3(-26.1,1) -22.6,1 ; R8.1@-22.7,2 -22.6,1.9 R8.1 -22.6,1 ; v3(-21.9,-20.3) -21.85,-20.3 -20.345,-18.795 R5.1 R6.1 ; v3(-21.3,20.7) -21.204,20.604 -21.204,20.104 -19.945,18.845 ; R5.1@-20.366,-18.724 -20.366,-17.123 Conn4.4 -18,-14.757 -18,-14.05 Conn4.3 ; R10.1 -19.945,18.845 ; Conn3.4 -17.543,14.3 -18.25,14.3 Conn3.3 -21,17.05 -21,17.649 -20.495,18.154 R9.1 -19.945,18.845 ; Conn5.4 -17.45,-0.512 -17.95,-1.012 Conn5.3 -21.988,-1.012 -22.6,-0.4 R7.1 -22.6,1 ; v3(12.9,11.4) 12.971,11.4 13.843,12.272 ; R4.1 13.105,13.005 13.11,13.005 13.843,12.272 ; R3.1 14.705,11.41 13.843,12.272 ; Conn2.3 16.214,-15.8 16.922,-15.8 Conn2.4 18.287,-17.165 18.287,-17.559 19.581,-18.854 19.995,-18.854 20.354,-18.495 R1.1 ; R25.1 19.086,-3.9 20.3,-2.686 20.3,5.4 ; Conn1.3 18.3,14.25 18.3,14.957 Conn1.4 ; R2.1@21.295,-17.645 20.495,-18.445 R1.1 ; v3(21.9,-20.4) 21.804,-20.304 21.804,-19.804 R1.1
  Bottom Layer w1.6: v4(11,7.2) 11,5.5 C15.2 L1.P$2 C16.2 20.3,5.4 v4(28,5.4)
BOOT: R21.1 U1.94 | length 4.1
  Top Layer w0.254: U1.94 9.233,24 9.433,24.2 v2(9.5,24.2)
  Bottom Layer w0.254: R21.1@7.35,24.3 7.35,24.273 7.423,24.2 v2(9.5,24.2)
BST: C13.1 U3.6 | length 2.6
  Bottom Layer w0.5: C13.1@11.325,-4.75 13.805,-4.75 13.85,-4.705 U3.6
CONFIG: U2.4
DIR: U1.64 U2.8 | length 29.5
  Top Layer w0.15: U1.64 0.478,11.103 1.581,10 2.4,10 9.5,2.9 9.5,-10.732 8.86,-11.372 U2.8
EN_REG: R24.1 U3.5 | length 1.7
  Bottom Layer w0.5: U3.5 14.8,-6.35 R24.1
FB: R25.2 R26.1 U3.4 | length 2.7
  Bottom Layer w0.5: U3.4@15.75,-5.065 16.35,-5.665 16.35,-5.85 ; R26.1@15.9,-6.3 16.35,-5.85 ; R25.2 17.1,-5.4 16.8,-5.4 16.35,-5.85
GND: C1.2 C2.2 C3.1 C4.1 C5.1 C6.1 C7.1 C8.1 C9.1 C10.2 C11.2 C12.1 C14.1 C15.1 C16.1 Conn1.7 Conn1.8 Conn1.GND Conn2.7 Conn2.8 Conn2.GND Conn3.7 Conn3.8 Conn3.GND Conn4.7 Conn4.8 Conn4.GND Conn5.7 Conn5.8 Conn5.GND D1.2 J1.4 J2.7 J3.7 J4.4 P3.3 pad.4@11.612,-18.112 pad.4@-19.612,10.112 pad.7@19.612,10.112 pad.7@-11.612,-18.112 R23.2 R26.2 SW1.2 U1.10 U1.19 U1.26 U1.49 U1.74 U1.99 U2.10 U2.16 U3.1 | length 259
  Top Layer w0.254: C2.2@-10.35,14.8 -10.35,14.9 -10.147,15.103 -10.047,15.103 -9.807,15.343 -9.307,15.343 C8.1 ; C8.1@-9.266,15.359 -9.125,15.5 U1.49@-7.722,15.5 ; C7.1@-9.2,27.15 -9.075,27.15 -8.925,27 U1.26@-7.722,27 ; C7.1 v1(-9.2,27.9) ; U1.49 v1(-6.4,15.5) ; C6.1 -3.013,30.163 U1.19@-3.013,28.734 ; U1.10@1.5,28.722 1.5,30.025 1.45,29.975 C5.1 2,30.2 ; v1(2,30.7) 2,30.2 ; C4.1 2,30.2 ; U1.74 5.478,11.897 5.65,11.725 C3.1 5.771,11.579 5.771,11.302 6.22,10.853 6.297,10.853 6.5,10.65 C1.2 ; U1.99@7.734,26.513 9.263,26.513 C9.1
  Top Layer w0.5: R23.2@-22.1,-4.3 R23.2 -22.2,1.047 -20.546,2.701 D1.2 D1.2@-19.454,2.701 ; pad.4@-19.61,10.112 -13.78,15.942 J1.4 ; v3(-14.8,-3.3) -14.8,-0.5 -16.734,1.434 -18.234,1.434 -19.298,2.498 -19.298,2.545 D1.2@-19.454,2.701 ; v3(-14.8,1.5) -16.001,2.701 D1.2@-19.401,2.701 ; v3(-14.8,5.2) -16.5,3.5 -18.603,3.5 -19.245,2.858 -19.298,2.858 -19.401,2.754 D1.2@-19.401,2.701 ; J2.7@-13.778,-15.944 -11.612,-18.11 pad.7@-11.612,-18.112 ; C6.1 -3.05,30.569 -2.8,30.819 v1(-2.8,30.9) ; C1.2 v1(7.2,10.6) ; C9.1 v1(9.85,26.55) ; pad.4@11.612,-18.112 11.612,-18.11 J4.4@13.778,-15.944 ; J3.7 13.778,15.938 v1(15.412,14.304) 15.416,14.304 19.608,10.112 pad.7@19.61,10.112 ; D1.2@-19.454,2.701 D1.2@-19.401,2.701
  Layer 1 w0.5: pad.4@-19.612,10.112 -19.612,-9.853 -19.5,-9.965 v3(-19.5,-10.1) ; v3@-19.574,-10.074 -19.612,-10.112 pad.7@-11.612,-18.112 ; pad.4@11.612,-18.112 19.105,-10.619 19.581,-10.619 19.612,-10.588 pad.7@19.612,10.112
  Bottom Layer w0.254: v1(-9.2,27.9) -6.9,27.9 v1(-6.2,27.2) -6.052,27.2 -5.925,27.073 -5.748,27.073 -5.4,26.725 -5.4,26.55 C12.1 ; C12.1@-5.052,26.377 -4.764,26.377 -4.21,25.823 -4.048,25.823 C11.2 ; C10.2 v1(4.1,23.8) 4.204,23.696 4.454,23.696 4.8,23.35 P3.3 4.8,20.11 SW1.2
  Bottom Layer w0.5: Conn4.GND@-21.082,-13.738 -18.678,-11.334 -18.678,-10.922 v3(-19.5,-10.1) ; Conn3.GND@-20.938,13.594 Conn3.GND@-18.675,11.331 ; pad.4@-19.612,10.112 -18.534,11.19 Conn3.GND@-18.534,10.554 ; Conn5.GND@-19.6,-3.412 -16.4,-3.412 -16.344,-3.356 -14.756,-3.356 v3@-14.7,-3.3 ; Conn5.7 -18.164,0.988 -17.664,1.488 Conn5.8 v3@-14.8,1.488 ; Conn5.GND@-19.6,3.888 -16.4,3.888 -16.2,3.888 -14.888,5.2 v3(-14.8,5.2) ; Conn3.7 -16.922,15.8 -16.214,15.8 -15.114,14.7 v1(-15,14.7) ; Conn4.8 -16.4,-15.986 -16.4,-15.278 -10.722,-9.6 v1(-10.7,-9.6) ; Conn4.GND@-15.921,-18.9 -13.658,-16.638 -13.086,-16.638 -11.612,-18.112 11.612,-18.112 13.23,-16.493 13.514,-16.493 Conn2.GND@15.776,-18.756 ; Conn3.GND@-15.776,18.756 -14.645,17.625 ; v3@-13.999,18.299 v3(-13.999,18.271) -14.645,17.625 ; Conn3.GND@-13.514,16.493 -14.645,17.625 ; Conn1.GND@13.758,16.638 14.889,17.769 ; v3(14,19.9) 14.008,19.892 14.008,18.65 14.889,17.769 ; v1(15.412,14.304) 15.525,14.304 Conn1.7 16.8,15.579 16.8,16.286 Conn1.8 ; Conn1.GND@16.021,18.9 14.889,17.769 ; v1(16.7,-13.4) 16.682,-13.382 Conn2.7 17.443,-14.2 18.15,-14.2 Conn2.8 ; R26.2 17.3,-8.3 v1(19.6,-10.6) ; Conn2.GND@18.534,-11.19 Conn2.GND@20.938,-13.594 ; Conn1.GND@18.848,11.476 Conn1.GND@18.902,11.476 ; Conn1.GND@18.902,11.458 18.902,10.822 pad.7@19.612,10.112 ; Conn1.GND@18.92,11.476 Conn1.GND@21.182,13.738
  Bottom Layer w0.6: v4(12.605,-2.305) 13.845,-2.305 U3.1
  Bottom Layer w1: C15.1 10.95,2.65 13.55,2.65 v4(13.6,2.7) 13.65,2.65 C16.1@18.65,2.65
GND1: D1.1 J1.3 J2.8 J3.8 J4.3 pad.3@10.714,-17.214 pad.3@-18.714,9.214 pad.8@18.714,9.214 pad.8@-10.714,-17.214 R20.2 U1.41 | length 117.9
  Top Layer w0.3: J1.3 -12.88,15.389 -12.6,15.668 -12.6,18 -11.1,19.5 U1.41
  Top Layer w0.5: R20.2@-22.3,5.7 R20.2 -22.1,5.7 -20.703,7.097 -20.703,7.142 -20.546,7.299 D1.1 ; D1.1@-19.531,7.489 D1.1@-19.454,7.299 ; D1.1@-19.298,6.997 -19.298,7.142 D1.1@-19.454,7.299 ; J2.8@-12.88,-15.046 -10.714,-17.212 pad.8@-10.714,-17.214 ; J1.3 -12.91,15.044 -18.714,9.24 -18.714,9.214 -18.714,8.039 D1.1@-19.454,7.299 ; pad.3@10.714,-17.214 10.714,-17.212 J4.3@12.88,-15.046 ; J3.8@12.91,15.044 18.714,9.24 pad.8@18.714,9.214
  Layer 1 w0.5: pad.3@-18.714,9.214 -18.714,-9.24 -10.74,-17.214 pad.8@-10.714,-17.214 ; pad.3@10.714,-17.214 10.74,-17.214 18.714,-9.24 pad.8@18.714,9.214
  Bottom Layer w0.5: pad.8@-10.714,-17.214 pad.3@10.714,-17.214
INT_1: Conn1.1 U1.98 | length 30.3
  Top Layer w0.254: U1.98 8.899,26 9.299,25.6 17.4,25.6 v1(24.7,18.3)
  Bottom Layer w0.254: Conn1.1 18.389,12.925 18.725,12.925 20.997,15.197 23.197,15.197 24.7,16.7 v1(24.7,18.3)
INT_2: Conn3.1 U1.52 | length 17.6
  Top Layer w0.254: v1(-11,11.3) -6.149,11.3 -5.522,11.927 U1.52
  Bottom Layer w0.254: Conn3.1 -19.489,14.124 -19.489,13.789 -16.982,11.282 -11.018,11.282 v1(-11,11.3)
INT_3: Conn4.1 U1.56 | length 35.2
  Top Layer w0.254: v1(-12.1,-8.3) -11.4,-7.6 -11.4,6.1 -8.3,9.2 -5.1,9.2 -3.522,10.778 U1.56
  Bottom Layer w0.254: Conn4.1@-17.37,-11.832 Conn4.1 -16.964,-11.6 -15.4,-11.6 v1(-12.1,-8.3)
INT_4: Conn5.1 U1.54 | length 27
  Top Layer w0.254: v1(-13.1,-1.4) -13.1,6 -8.8,10.3 -5.6,10.3 -4.522,11.378 U1.54
  Bottom Layer w0.254: Conn5.1 -18.95,-2.012 -18.762,-2.2 -13.9,-2.2 v1(-13.1,-1.4)
INT_5: Conn2.1 U1.69 | length 33.6
  Top Layer w0.254: U1.69 2.978,10.422 10.223,3.177 10.223,-9.423 v1(11.1,-10.3)
  Bottom Layer w0.254: v1(11.1,-10.3) 13.3,-12.5 13.3,-14.3 Conn2.1
LPn_1: Conn1.2 U1.97 | length 21.7
  Top Layer w0.254: U1.97 7.713,25.487 8.409,25.487 8.43,25.467 8.572,25.467 9.039,25 17,25 v1(20.9,21.1)
  Bottom Layer w0.254: Conn1.2 21.132,16.375 cw(c22.3,16.4) 21.132,16.425 21.132,20.84 20.966,21.006 20.966,21.034 v1(20.9,21.1)
LPn_2: Conn3.2 U1.51 | length 12.5
  Top Layer w0.254: v1(-10,12.1) -6.17,12.1 -6.022,12.249 U1.51
  Bottom Layer w0.254: Conn3.2@-17.232,12.675 -17.158,12.675 -16.583,12.1 v1(-10,12.1)
LPn_3: Conn4.2 U1.55 | length 41.6
  Top Layer w0.254: v1(-23.2,-15.2) -12.1,-4.1 -12.1,6.2 -8.5,9.8 -5.299,9.8 -4.022,11.078 U1.55
  Bottom Layer w0.254: v1(-23.2,-15.2) -23.106,-15.2 -22.906,-15 -21.909,-15 -21.368,-15.542 Conn4.2@-20.199,-15.542
LPn_4: Conn5.2 U1.53 | length 22.5
  Top Layer w0.254: v1(-13.8,-0.6) -13.8,6.2 -9.2,10.8 -5.8,10.8 -5.022,11.578 U1.53
  Bottom Layer w0.254: Conn5.2 -14.712,-1.512 v1(-13.8,-0.6)
LPn_5: Conn2.2 U1.68 | length 48
  Top Layer w0.254: U1.68 2.478,10.421 9.869,3.03 9.869,-10.169 v1(21.1,-21.4)
  Bottom Layer w0.254: Conn2.2 17.12,-17.416 21.1,-21.396 v1(21.1,-21.4)
M0: U1.61 U2.2 | length 31.5
  Top Layer w0.254: U2.2 -10.3,-7.78 -10.3,2.8 -3.8,9.3 -2.008,9.3 -1.022,10.286 U1.61
M1: U1.62 U2.3 | length 32
  Top Layer w0.254: U2.3 -3.84,-9.26 -9.4,-3.7 -9.4,2.8 -3.5,8.7 -1.7,8.7 -0.522,9.878 U1.62
NetC10_1: C10.1 U1.12 Y1.2 | length 6.6
  Top Layer w0.254: U1.12@0.5,28.722 0.5,26.2 v2(0.9,25.8)
  Bottom Layer w0.254: v2(0.9,25.8) Y1.2 ; Y1.2@2.35,25.877 3.198,26.725 C10.1
NetC11_1: C11.1 U1.13 Y1.1 | length 6.7
  Top Layer w0.254: v2(-0.4,25.8) 0,26.2 U1.13@0,28.722
  Bottom Layer w0.254: C11.1 -2.798,26.725 Y1.1@-1.95,25.877 ; Y1.1 v2(-0.4,25.8)
NetP3_2: P3.2 R21.2 | length 1.3
  Bottom Layer w0.254: P3.2 R21.2@5.6,24.45
NetR11_2: R11.2 U1.22 | length 14.3
  Top Layer w0.3: R11.2 -15,27.8 -11.5,31.3 -6,31.3 -4.522,29.822 U1.22
NetR12_2: R12.2 U1.23 | length 12.2
  Top Layer w0.3: R12.2 -14,27.7 -11,30.7 -6.034,30.7 -5.022,29.687 U1.23
NetR13_2: R13.2 U1.24 | length 10.3
  Top Layer w0.3: R13.2@-13.001,27.101 -13.001,27.699 -10.5,30.2 -6.1,30.2 -5.522,29.622 U1.24
NetR14_2: R14.2 U1.25 | length 8.3
  Top Layer w0.3: R14.2 -12,27.7 -10,29.7 -6.2,29.7 -6.022,29.522 U1.25
NetR15_2: R15.2 U1.30 | length 2.2
  Top Layer w0.254: R15.2 U1.30
NetR16_2: R16.2 U1.31 | length 2.3
  Top Layer w0.254: R16.2 -9.1,24.1 -8.7,24.5 U1.31
NetR17_2: R17.2 U1.34 | length 2.2
  Top Layer w0.254: R17.2 -9.7,23 U1.34
NetR18_2: R18.2 U1.35 | length 2.2
  Top Layer w0.254: R18.2@-9.7,22.5 U1.35
  Top Layer w0.3: R18.2 -9.85,22.35 R18.2@-9.7,22.35
NRST: C12.2 SW1.1 U1.14 | length 12.7
  Top Layer w0.254: v2(-4.4,24.2) -4.353,24.247 -3.053,24.247 -0.5,26.8 U1.14@-0.5,28.722
  Bottom Layer w0.254: C12.2 -5.275,25.55 -5.152,25.427 -5.152,25.227 -4.447,24.522 -4.447,24.247 v2(-4.4,24.2) -4.4,20.11 SW1.1
OUTPUT1: J1.5 J2.6 J3.6 J4.5 P1.2 pad.5@12.51,-19.01 pad.5@-20.51,11.01 pad.6@20.51,11.01 pad.6@-12.51,-19.01 | length 118.9
  Top Layer w0.3: v1(12.6,18.1) 13.416,18.1 J3.6
  Top Layer w0.4: pad.6@20.508,11.01 pad.6@20.51,11.01
  Top Layer w0.5: pad.5@-20.51,11.01 -20.508,11.01 J1.5@-14.678,16.84 ; J2.6 -12.51,-19.008 pad.6@-12.51,-19.01 ; pad.5@12.51,-19.01 12.51,-19.008 J4.5 J4.5 ; J3.6 15.382,16.133 15.386,16.133 pad.6@20.51,11.01
  Layer 1 w0.5: pad.5@-20.51,11.01 -20.51,-11.01 pad.6@-12.51,-19.01 ; pad.5@12.51,-19.01 20.51,-11.01 pad.6@20.51,11.01
  Bottom Layer w0.3: P1.2 12.13,17.2 12.585,17.655 12.585,18.085 v1(12.6,18.1)
  Bottom Layer w0.5: pad.6@-12.51,-19.01 pad.5@12.51,-19.01
OUTPUT2: J1.6 J2.5 J3.5 J4.6 P2.2 pad.5@21.408,11.908 pad.5@-13.408,-19.908 pad.6@13.408,-19.908 pad.6@-21.408,11.908 | length 125.2
  Top Layer w0.3: v1(12.6,18.954) 14.146,18.954 15.362,17.738 J3.5
  Top Layer w0.5: pad.6@-21.406,11.908 J1.6 J1.6 ; J2.5@-15.574,-17.74 -13.408,-19.906 pad.5@-13.408,-19.908 ; pad.6@13.408,-19.908 13.408,-19.906 15.574,-17.74 J4.6 ; J3.5 21.404,11.908 pad.5@21.408,11.908
  Layer 1 w0.5: pad.6@-21.408,11.908 -21.408,-11.908 pad.5@-13.408,-19.908 ; pad.6@13.408,-19.908 21.408,-11.908 pad.5@21.408,11.908
  Bottom Layer w0.3: P2.2 12.2,19.8 12.593,19.407 12.593,18.961 v1(12.6,18.954)
  Bottom Layer w0.5: pad.5@-13.408,-19.908 pad.6@13.408,-19.908
PWM_CH1: J1.10 J2.1 J3.1 J4.10 pad.1@25,15.5 pad.1@-17,-23.5 pad.10@17,-23.5 pad.10@-25,15.5 R11.1 R15.1 | length 157.7
  Top Layer w0.4: J1.10 -15.496,25 ; R11.1 -15.125,25.975 -15.125,25.371 -15.496,25 ; R15.1 -15.496,25
  Top Layer w0.5: pad.10@-25,15.5 -24.962,15.538 -24.962,16.638 -22,19.6 -20.896,19.6 J1.10 ; J2.1@-19.166,-21.332 -17,-23.498 pad.1@-17,-23.5 ; pad.10@17,-23.5 17,-23.498 J4.10@19.166,-21.332 ; J3.1 21.625,18.871 22.829,18.871 24.962,16.738 24.962,15.538 pad.1@25,15.5
  Layer 1 w0.4: pad.10@17,-23.5 21.6,-18.9 22.892,-18.9 24.946,-16.846 24.946,15.446 pad.1@25,15.5
  Layer 1 w0.5: pad.10@-25,15.5 -25,-17.12 -23.12,-19 -21.5,-19 pad.1@-17,-23.5
  Bottom Layer w0.5: pad.1@-17,-23.5 -13,-23.5 -10.2,-26.3 9.8,-26.3 12.6,-23.5 pad.10@17,-23.5
PWM_CH2: J1.9 J2.2 J3.2 J4.9 pad.2@24.102,14.602 pad.2@-16.102,-22.602 pad.9@16.102,-22.602 pad.9@-24.102,14.602 R12.1 R16.1 | length 151.2
  Top Layer w0.5: pad.9@-24.102,14.602 -24.102,16.424 -21.969,18.558 -20.142,18.558 J1.9 -14.6,24.1 v1(-14,24.1) R16.1 ; J2.2@-18.268,-20.434 -16.102,-22.6 pad.2@-16.102,-22.602 ; v1(-14,25.754) R12.1 ; pad.9@16.102,-22.602 16.102,-22.6 J4.9@18.268,-20.434 ; J3.2 20.7,18 22.526,18 24.102,16.424 pad.2@24.102,14.602
  Layer 1 w0.5: pad.9@-24.102,14.602 -24.102,-16.698 -22.8,-18 -20.704,-18 pad.2@-16.102,-22.602 ; pad.9@16.102,-22.602 20.704,-18 22.526,-18 24.096,-16.43 24.096,14.596 pad.2@24.102,14.602
  Bottom Layer w0.5: pad.2@-16.102,-22.602 pad.9@16.102,-22.602 ; v1(-14,24.1) v1(-14,25.754)
PWM_CH3: J1.8 J2.3 J3.3 J4.8 pad.3@23.204,13.704 pad.3@-15.204,-21.704 pad.8@15.204,-21.704 pad.8@-23.204,13.704 R13.1 R17.1 | length 141.5
  Top Layer w0.5: pad.8@-23.204,13.704 -23.17,13.704 -17.37,19.504 -13.674,23.2 R17.1 ; J2.3@-17.37,-19.536 -15.204,-21.702 pad.3@-15.204,-21.704 ; v1(-13,25.754) R13.1 ; pad.8@15.204,-21.704 15.204,-21.702 J4.8@17.37,-19.536 ; J3.3 17.37,19.331 17.828,18.873 22.958,13.742 23.166,13.742 pad.3@23.204,13.704
  Layer 1 w0.5: pad.8@-23.204,13.704 -23.204,-13.496 -15.242,-21.458 -15.242,-21.666 pad.3@-15.204,-21.704 ; pad.8@15.204,-21.704 15.204,-21.67 23.204,-13.67 pad.3@23.204,13.704
  Bottom Layer w0.5: pad.3@-15.204,-21.704 -15.166,-21.742 15.166,-21.742 pad.8@15.204,-21.704 ; v1(-13,23.2) v1(-13,25.754)
PWM_CH4: J1.7 J2.4 J3.4 J4.7 pad.4@22.306,12.806 pad.4@-14.306,-20.806 pad.7@14.306,-20.806 pad.7@-22.306,12.806 R14.1 R18.1 | length 136
  Top Layer w0.5: pad.7@-22.304,12.806 -16.474,18.636 -12.81,22.3 v1(-12,22.3) R18.1 ; J2.4 -14.306,-20.804 pad.4@-14.306,-20.806 ; v1(-12,25.754) R14.1 ; pad.7@14.306,-20.806 14.306,-20.804 J4.7 ; J3.4@16.474,18.636 22.304,12.806 pad.4@22.306,12.806
  Layer 1 w0.5: pad.7@-22.306,12.806 -22.306,-12.806 pad.4@-14.306,-20.806 ; pad.7@14.306,-20.806 22.306,-12.806 pad.4@22.306,12.806
  Bottom Layer w0.5: pad.4@-14.306,-20.806 pad.7@14.306,-20.806 ; v1(-12,22.3) v1(-12,25.754)
RX/DM: P1.1 U1.71 | length 11.2
  Top Layer w0.3: U1.71 3.978,15.674 4.3,15.996 v1(4.3,16)
  Bottom Layer w0.3: v1(4.3,16) 4.381,16 4.581,16.2 5.534,16.2 8.136,18.802 9.303,18.802 10.104,18 P1.1
SCL_1: Conn1.9 Conn1.10 R4.2 U1.92 | length 18.6
  Top Layer w0.254: U1.92 12.733,23 12.933,22.8 v2(13,22.8)
  Bottom Layer w0.254: v2(13,22.8) 14.4,22.8 17.9,19.3 17.9,18.8 Conn1.10
  Bottom Layer w0.5: R4.2 13.995,14.188 Conn1.9 16.2,16.393 16.2,17.1 Conn1.10
SCL_2: Conn3.9 Conn3.10 R10.2 U1.46 | length 14.7
  Top Layer w0.254: v2(-9.7,17.7) -9.7,17.633 -9.067,17 U1.46
  Bottom Layer w0.254: Conn3.10 -14.491,15.503 -13.697,14.709 -13.509,14.709 -13.5,14.7 -13.2,14.7 -11.8,16.1 -11.8,17.7 -11.4,18.1 -10.1,18.1 v2(-9.7,17.7)
  Bottom Layer w0.5: R10.2@-18.112,18.405 Conn3.9 -16.107,16.4 -15.4,16.4 Conn3.10
SCL_3: Conn4.9 Conn4.10 R6.2 U1.67 | length 42.3
  Top Layer w0.254: v2(1.7,10.7) 1.7,10.767 1.978,11.045 U1.67
  Bottom Layer w0.254: Conn4.9 -13.5,-13.793 -9.4,-9.693 -9.4,2.8 -3.5,8.7 -0.233,8.7 1.7,10.633 v2(1.7,10.7)
  Bottom Layer w0.5: R6.2@-17.905,-18.905 Conn4.10 -15.8,-16.8 -15.8,-16.093 Conn4.9
SCL_4: Conn5.9 Conn5.10 R8.2 U1.59 | length 25.3
  Top Layer w0.254: v2(-2.5,11.1) -2.022,11.578 U1.59
  Bottom Layer w0.254: Conn5.10@-16.42,2.468 -16.355,2.532 -15.268,2.532 -13.3,4.5 -13.3,5.588 -7.788,11.1 v2(-2.5,11.1)
  Bottom Layer w0.5: R8.2@-21.012,1.988 Conn5.9 -18.012,1.988 -17.532,2.468 Conn5.10@-16.42,2.468
SCL_5: Conn2.9 Conn2.10 R2.2 U1.79 | length 41
  Top Layer w0.254: U1.79 9.333,16.5 9.853,15.981 9.853,15.747 v2(9.9,15.7)
  Bottom Layer w0.254: v2(9.9,15.7) 9.9,15.2 9.6,14.9 9.6,-6.1 15,-11.5 16.157,-11.5 Conn2.9 ; Conn2.10 19.948,-14.667 20.7,-15.419 20.7,-16.035 20.305,-16.43 R2.2
  Bottom Layer w0.5: Conn2.9 18.257,-13.6 18.964,-13.6 Conn2.10
SDA_1: Conn1.5 Conn1.6 R3.2 U1.93 | length 21.6
  Top Layer w0.254: U1.93 v2(13.4,23.5)
  Bottom Layer w0.254: v2(13.4,23.5) 14.6,23.5 19.5,18.6 19.5,17.571 Conn1.6
  Bottom Layer w0.5: R3.2 15.654,12.436 15.654,12.578 15.724,12.648 15.724,13.089 Conn1.5 17.6,14.964 17.6,15.671 Conn1.6
SDA_2: Conn3.5 Conn3.6 R9.2 U1.47 | length 16.4
  Top Layer w0.254: v2(-10.7,17.2) -10.669,17.169 -10.069,17.169 -9.4,16.5 U1.47
  Bottom Layer w0.254: R9.2@-19.515,17.234 -19.515,17.295 R9.2 ; Conn3.6 -14.929,13.1 -14,13.1 -11.3,15.8 -11.3,16.9 -11,17.2 v2(-10.7,17.2)
  Bottom Layer w0.5: R9.2@-19.576,17.234 -19.576,17.04 Conn3.5 -17.536,15 -16.829,15 Conn3.6
SDA_3: Conn4.5 Conn4.6 R5.2 U1.66 | length 41.4
  Top Layer w0.254: v2(1.3,11.5) 1.3,11.567 1.478,11.745 U1.66
  Bottom Layer w0.254: Conn4.5 -16.416,-13.815 -10.327,-7.726 -10.327,2.773 -3.8,9.3 -0.9,9.3 v2(1.3,11.5)
  Bottom Layer w0.5: R5.2 -19.376,-17.734 -19.376,-17.593 -19.305,-17.522 -19.305,-17.476 Conn4.6 -17.3,-15.471 -17.3,-14.764 Conn4.5
SDA_4: Conn5.5 Conn5.6 R7.2 U1.60 | length 28.7
  Top Layer w0.254: v2(-2,10.2) -1.972,10.2 -1.522,10.65 U1.60
  Bottom Layer w0.254: Conn5.6 -14.112,0.488 -12.5,2.1 -12.5,5.4 -7.7,10.2 v2(-2,10.2)
  Bottom Layer w0.5: R7.2@-21.2,0.1 -21.088,-0.012 Conn5.5 -18.012,-0.012 -17.512,0.488 Conn5.6
SDA_5: Conn2.5 Conn2.6 R1.2 U1.78 | length 39.5
  Top Layer w0.254: U1.78 8.818,16 9.1,15.718 v2(9.1,15.7)
  Bottom Layer w0.254: v2(9.1,15.7) 9.1,-7.271 Conn2.5 ; Conn2.6 18.994,-16.458 18.994,-16.632 19,-16.638 19,-16.959 19.505,-17.464 R1.2
  Bottom Layer w0.5: Conn2.5 16.929,-15.1 17.636,-15.1 Conn2.6
SLEEP: R19.2 U2.6 | length 2.1
  Top Layer w0.5: U2.6@3.79,-11.71 3.79,-13.79 R19.2
STEP: U1.63 U2.7 | length 30.5
  Top Layer w0.254: U1.63 -0.022,10.922 1.3,9.6 2.3,9.6 9.1,2.8 9.1,-8.6 6.319,-11.381 U2.7
SW: C13.2 L1.P$1 U3.2 | length 9.5
  Bottom Layer w0.5: C13.2@11.3,-3.85 11.3,-1.3 12.943,0.343 14.743,0.343 L1.P$1
  Bottom Layer w0.6: U3.2 L1.P$1
SWCLK: P2.3 U1.76 | length 8
  Top Layer w0.3: U1.76 10.2,15 10.654,15.454 10.654,18.446 v1(10.1,19)
  Bottom Layer w0.3: v1(10.1,19) P2.3
SWDIO: P1.3 U1.72 | length 8.8
  Top Layer w0.3: U1.72 4.478,14.497 4.7,14.719 v1(4.7,14.8)
  Bottom Layer w0.3: v1@4.726,14.8 6.2,14.8 7.8,16.4 P1.3
TRIG2: U1.80
TX/DP: P2.1 U1.70 | length 12.6
  Top Layer w0.3: U1.70 3.478,16.178 v1(4.3,17)
  Bottom Layer w0.3: v1(4.3,17) 4.381,17 4.581,16.8 5.286,16.8 7.887,19.402 9.506,19.402 10.604,20.5 11.1,20.5 P2.1
VCAP_1: C2.1 U1.48 | length 2.6
  Top Layer w0.254: C2.1@-10.2,16.3 -9.913,16.013 -7.734,16.013 U1.48@-7.722,16
VCAP_2: C1.1 U1.73 | length 2.7
  Top Layer w0.254: U1.73 4.978,10.722 C1.1
VIN: C14.2 D2.1 J1.1 J2.10 J3.10 J4.1 pad.1@8.918,-15.418 pad.1@-16.918,7.418 pad.10@16.918,7.418 pad.10@-8.918,-15.418 R20.1 R24.2 U2.9 U3.3 | length 139
  Top Layer w0.5: R20.1 -20.036,4.3 -16.918,7.418 -15.482,7.418 -12.8,10.1 -12.8,11.532 J1.1 ; J2.10@-11.084,-13.25 -8.918,-15.416 pad.10@-8.918,-15.418 ; pad.1@8.918,-15.418 8.918,-15.416 J4.1@11.084,-13.25 ; J3.10 11.084,13.045 11.6,12.528 11.6,10.5 14.682,7.418 pad.10@16.918,7.418
  Top Layer w1: D2.1@-19.548,-2.795 -16.642,-5.7 v3(-16.6,-5.7) ; U2.9@-8.92,-24.671 U2.9
  Layer 1 w0.5: 13.35,-9.25 v1(13.35,-7.65)
  Layer 1 w1: pad.1@-16.918,7.418 -16.6,7.1 v3(-16.6,-5.7) -11.3,-11 -11.3,-13.036 pad.10@-8.918,-15.418 ; U2.9 -8.729,-24.209 -8.729,-23.129 -8.1,-22.5 -8.1,-16.236 pad.10@-8.918,-15.418 ; pad.10@16.918,7.418 16.6,7.1 v4(16.6,-2.3) 16.6,-6 13.35,-9.25 13,-9.6 13,-11.336 8.918,-15.418 pad.10@-8.918,-15.418
  Bottom Layer w0.5: pad.10@-8.918,-15.418 pad.1@8.918,-15.418 ; v1(13.35,-7.65) R24.2
  Bottom Layer w1: U3.3@15.955,-2.305 16.595,-2.305 v4(16.6,-2.3) 16.696,-2.204 18.596,-2.204 C14.2@18.65,-2.15
VIN1: D2.2 J1.2 J2.9 J3.9 J4.2 pad.2@9.816,-16.316 pad.2@-17.816,8.316 pad.9@17.816,8.316 pad.9@-9.816,-16.316 R22.1 R22.2 R23.1 U1.44 | length 113.8
  Top Layer w0.3: J1.2 -11.982,14.491 -11.7,14.772 -11.7,17.3 -10.6,18.4 -9.2,18.4 -8.8,18 U1.44
  Top Layer w0.5: R23.1@-22.3,-5.7 R23.1 -22.1,-5.7 -20.703,-7.097 -20.703,-7.142 D2.2@-20.546,-7.299 ; D2.2 v1@-16.901,-7.299 ; pad.2@-17.816,8.316 -15.986,8.316 -14.141,10.16 -14.141,11.987 J1.2 ; J2.9@-11.982,-14.148 -9.816,-16.314 pad.9@-9.816,-16.316 ; pad.2@9.816,-16.316 9.816,-16.314 J4.2@11.982,-14.148 ; J3.9 14.3,11.828 14.3,9.8 15.784,8.316 pad.9@17.816,8.316
  Layer 1 w0.5: pad.2@-17.816,8.316 -17.816,-6.384 v1(-16.9,-7.3) -12.8,-11.4 -12.8,-13.332 pad.9@-9.816,-16.316 ; pad.2@9.816,-16.316 14.2,-11.932 14.2,-10.101 17.854,-6.447 17.854,8.278 pad.9@17.816,8.316
  Bottom Layer w0.5: pad.9@-9.816,-16.316 pad.2@9.816,-16.316
pads on no net: J1. J2. J3. J4. U1.1 U1.2 U1.3 U1.4 U1.5 U1.7 U1.8 U1.9 U1.15 U1.16 U1.17 U1.18 U1.20 U1.28 U1.29 U1.32 U1.33 U1.36 U1.37 U1.38 U1.39 U1.40 U1.42 U1.43 U1.45 U1.57 U1.58 U1.65 U1.77 U1.81 U1.82 U1.83 U1.84 U1.85 U1.86 U1.87 U1.88 U1.89 U1.90 U1.91 U1.95 U1.96 U2.1 U2.5 U2.11 U2.12 U2.13 U2.14 U2.15

## Polygon pours and split planes (outlines as drawn)
3.3V on Layer 1 "NONET_L-01_P-001" (solid, remove dead copper, shelved, pour order 3): -35.173,0.167 ccw(c-0.084,0.167) -0.084,-34.922 ccw(c-0.084,0.167) 35.006,0.167 ccw(c-0.084,0.167) -0.084,35.256 ccw(c-0.084,0.167)
GND on Layer 2 "NONET_L-01_P-001" (solid, remove dead copper, shelved, pour order 4): -35.256,0.167 ccw(c-0.167,0.167) -0.167,-34.922 ccw(c-0.167,0.167) 34.922,0.167 ccw(c-0.167,0.167) -0.167,35.256 ccw(c-0.167,0.167)
GND on Top Layer "NONET_L-01_P-001" (solid, remove dead copper, shelved, pour order 2): -35.089,0 ccw(c0,0) 0,-35.089 ccw(c0,0) 35.089,0 ccw(c0,0) 0,35.089 ccw(c0,0)
GND on Bottom Layer "NONET_L-01_P-001" (solid, remove dead copper, shelved, pour order 1): -35.089,0 ccw(c0,0) 0,-35.089 ccw(c0,0) 35.089,0 ccw(c0,0) 0,35.089 ccw(c0,0)

## Keep-outs
Keep-Out Layer:
  the board outline again, w0.1

## Silkscreen, mask and mechanical layers (free items; w line width, h text height)
Top Overlay:
  circle w0.254: c0,0 r17.253
  lines w0.2: -24.812,-24.812 -7.7,-7.7 0,0 ; -24.812,24.812 0,0 ; 24.812,-24.812 0,0 ; 24.812,24.812 0,0
  text "PROJEKT KOLIBRI" at 30.9,-12.342 h1.52 r90
  text "Domen Višnar / prof. dr. Matej Možek / University of Ljubljana / Faculty of Electrical Engineering" at 27.1,-18.1 h2.2 r90
Bottom Overlay:
  lines w0.5: -10.1,-10.1 10.1,-10.1 10.1,10.1 -10.1,10.1 -10.1,-10.1

## Text inside footprints (layer, text, board x,y; h text height)
D1: Top Overlay "*" at -20.635,8.658 h1.27 r270; Top Assembly "*" at -20.635,8.581 h1.27 r270
D2: Top Overlay "*" at -20.635,-1.342 h1.27 r270; Top Assembly "*" at -20.635,-1.419 h1.27 r270
U1: Top Overlay "*" at 5.974,30.411 h1.27 r270; Top Assembly "*" at 5.974,30.411 h1.27 r270